# Altium PCB NBP-28 Pin_Swap_Example.PcbDoc (part 1 of 4)
Units mil, origin at the board's own origin, x right, y up, seen from the top; angles counter-clockwise.
Board outline 2716.54 x 4967.15 mil, 10 copper layers (Top Layer, Mid-Layer 1, VCC1V2, Mid-Layer 2, VCC, GND, MidLayer4, VCCINT, Mid-Layer 3, Bottom Layer), stack 81 mil thick; 254 components, 445 nets, 1667 pads, 770 vias.
Unrouted connection lines stored in the file: 611.
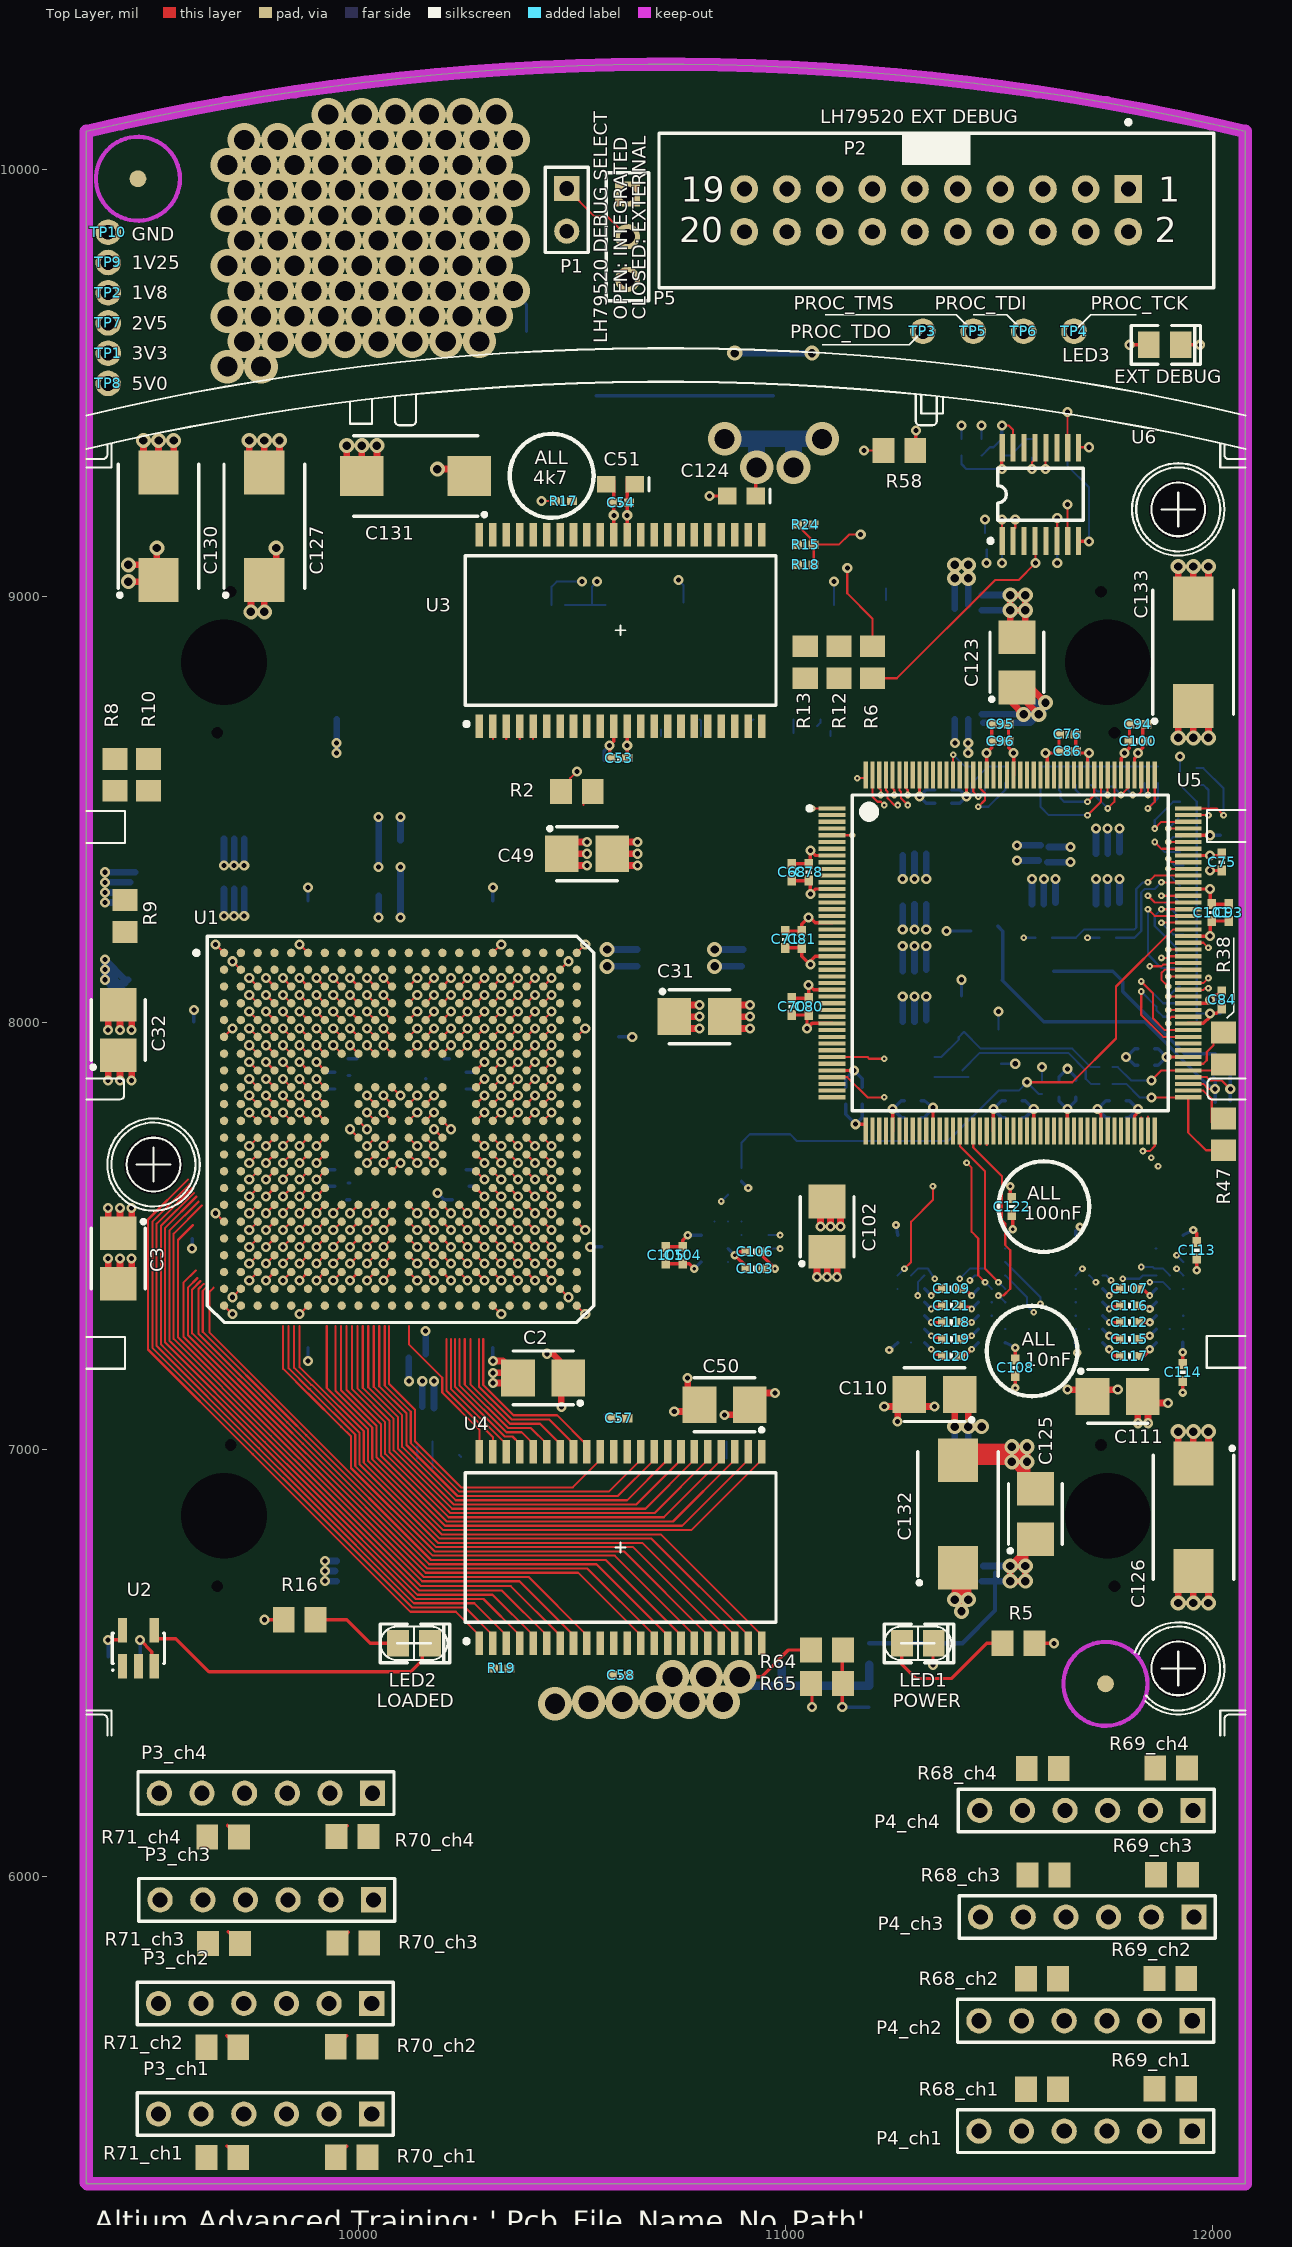
[diagram p0: Top Layer view]
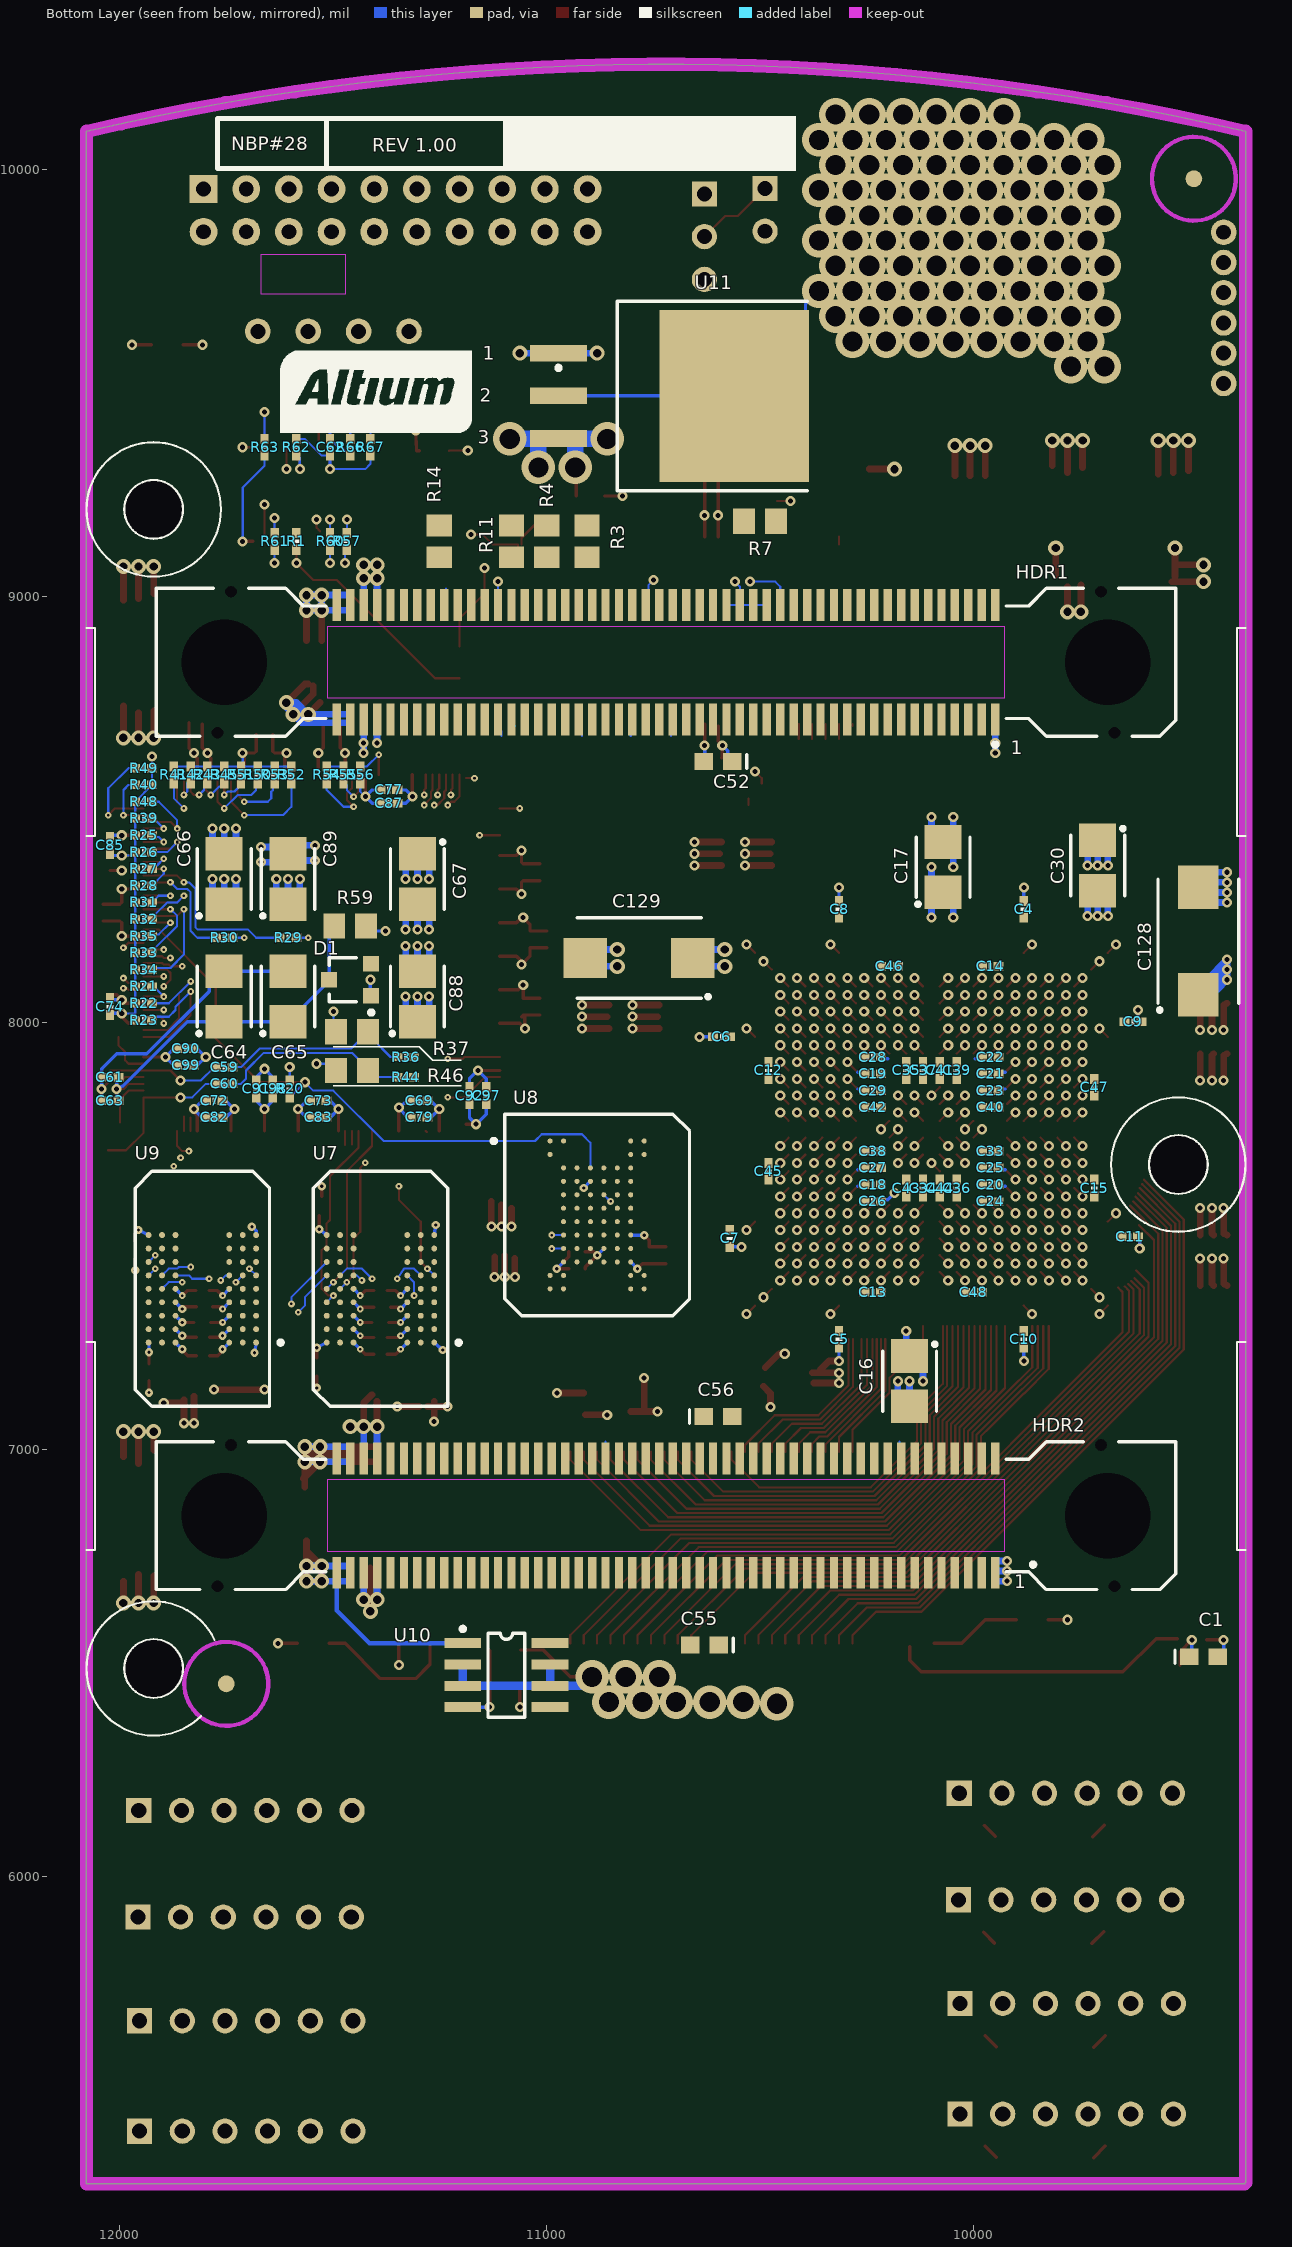
[diagram p1: Bottom Layer view, seen from below]
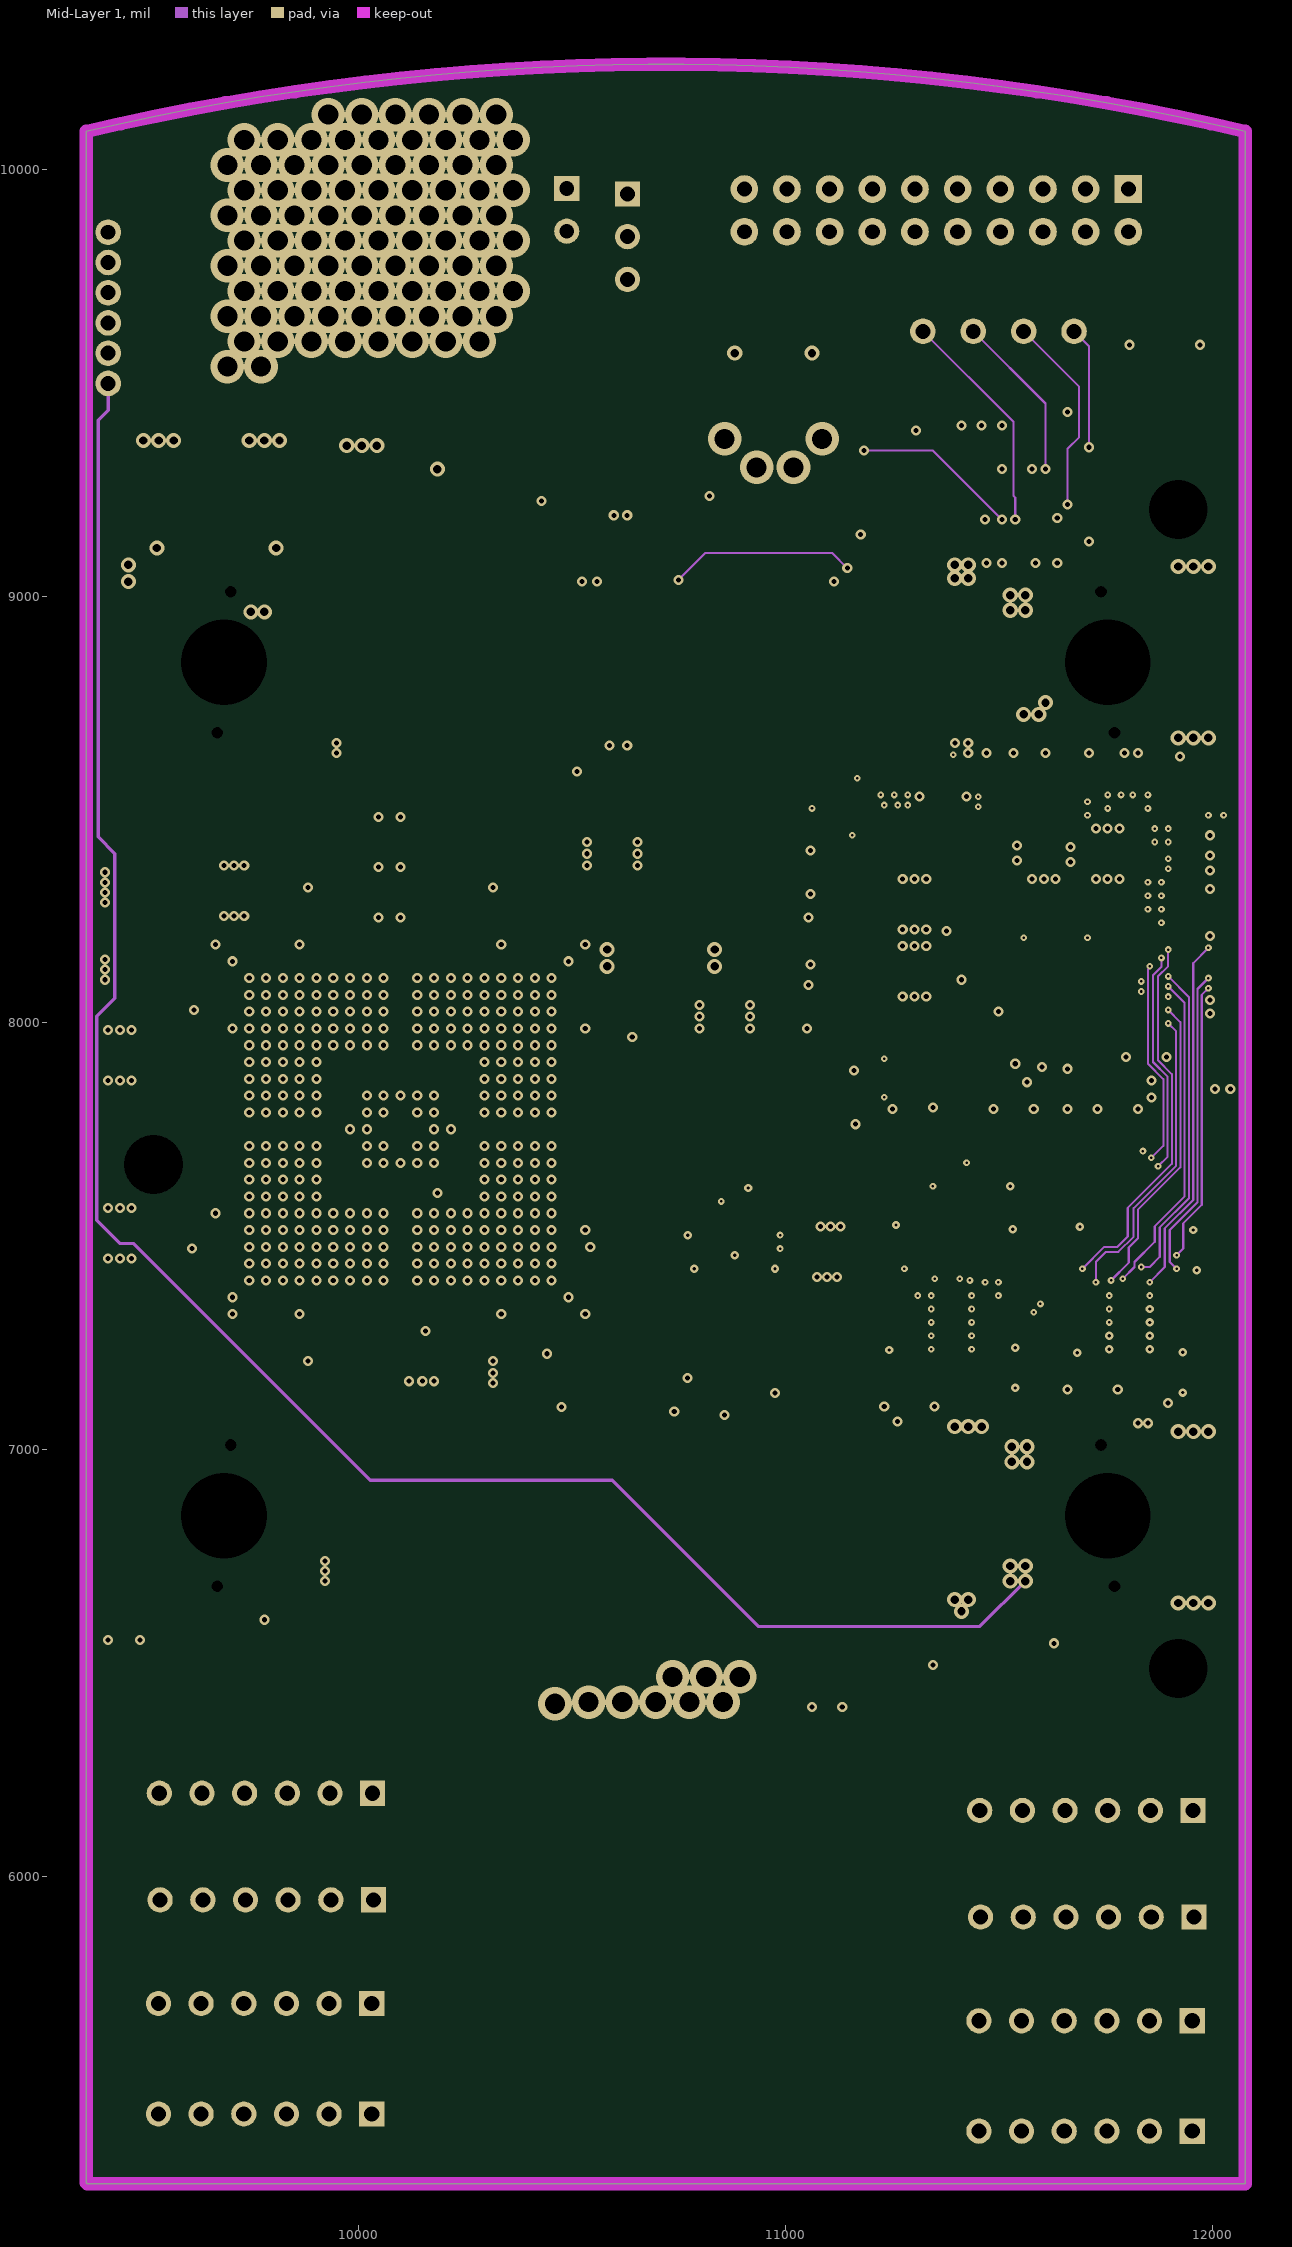
[diagram p2: Mid-Layer 1]
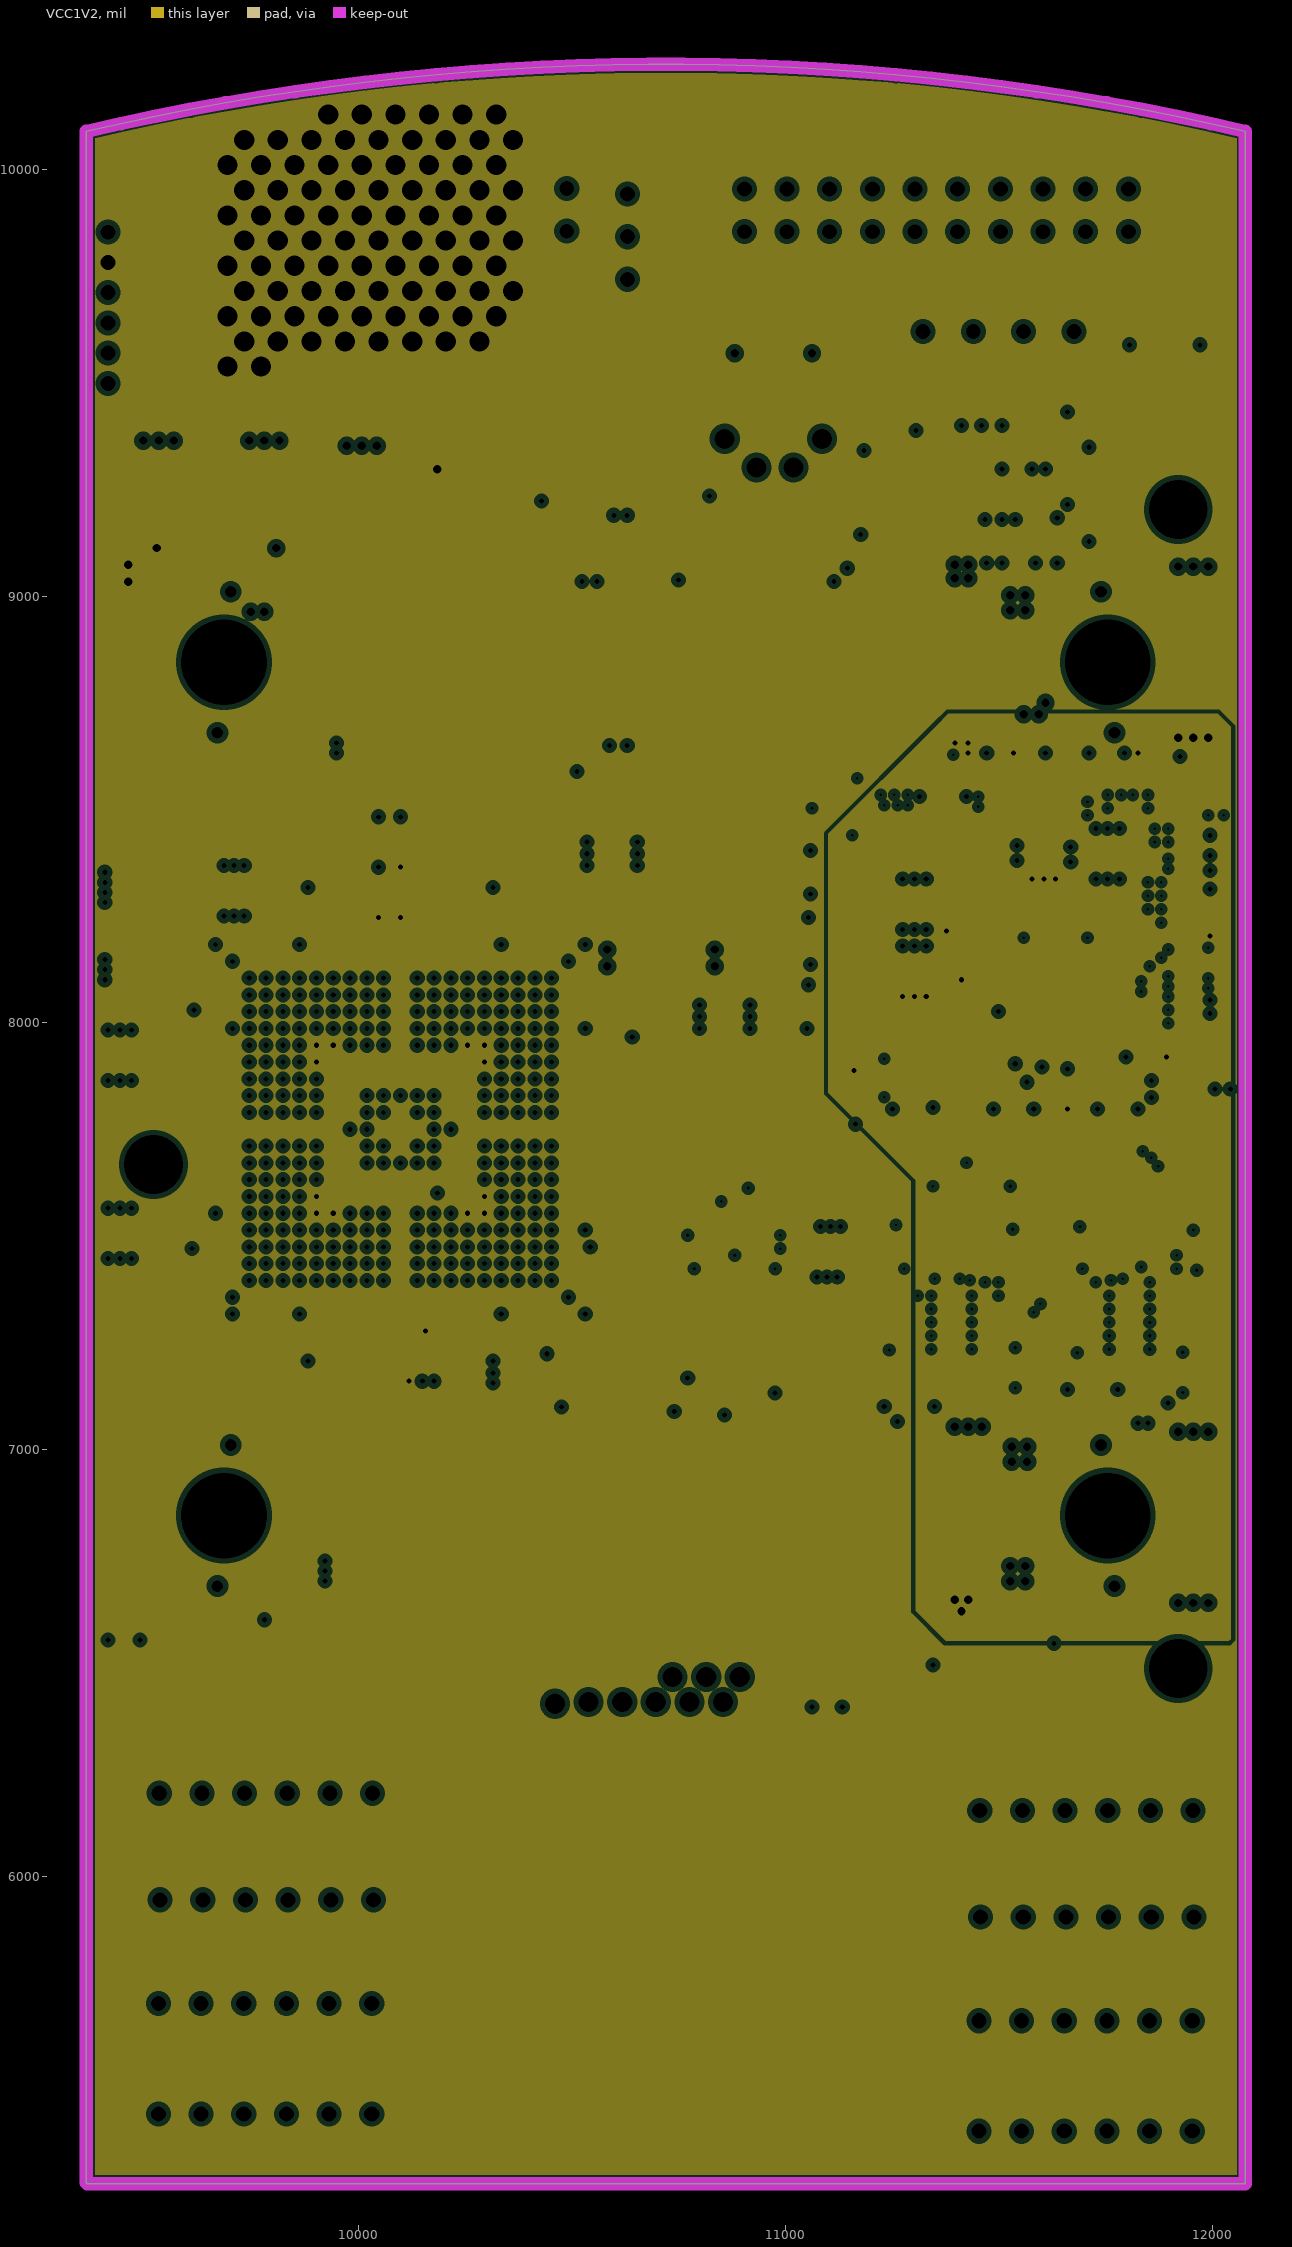
[diagram p3: VCC1V2, clearances drawn from the general rule]
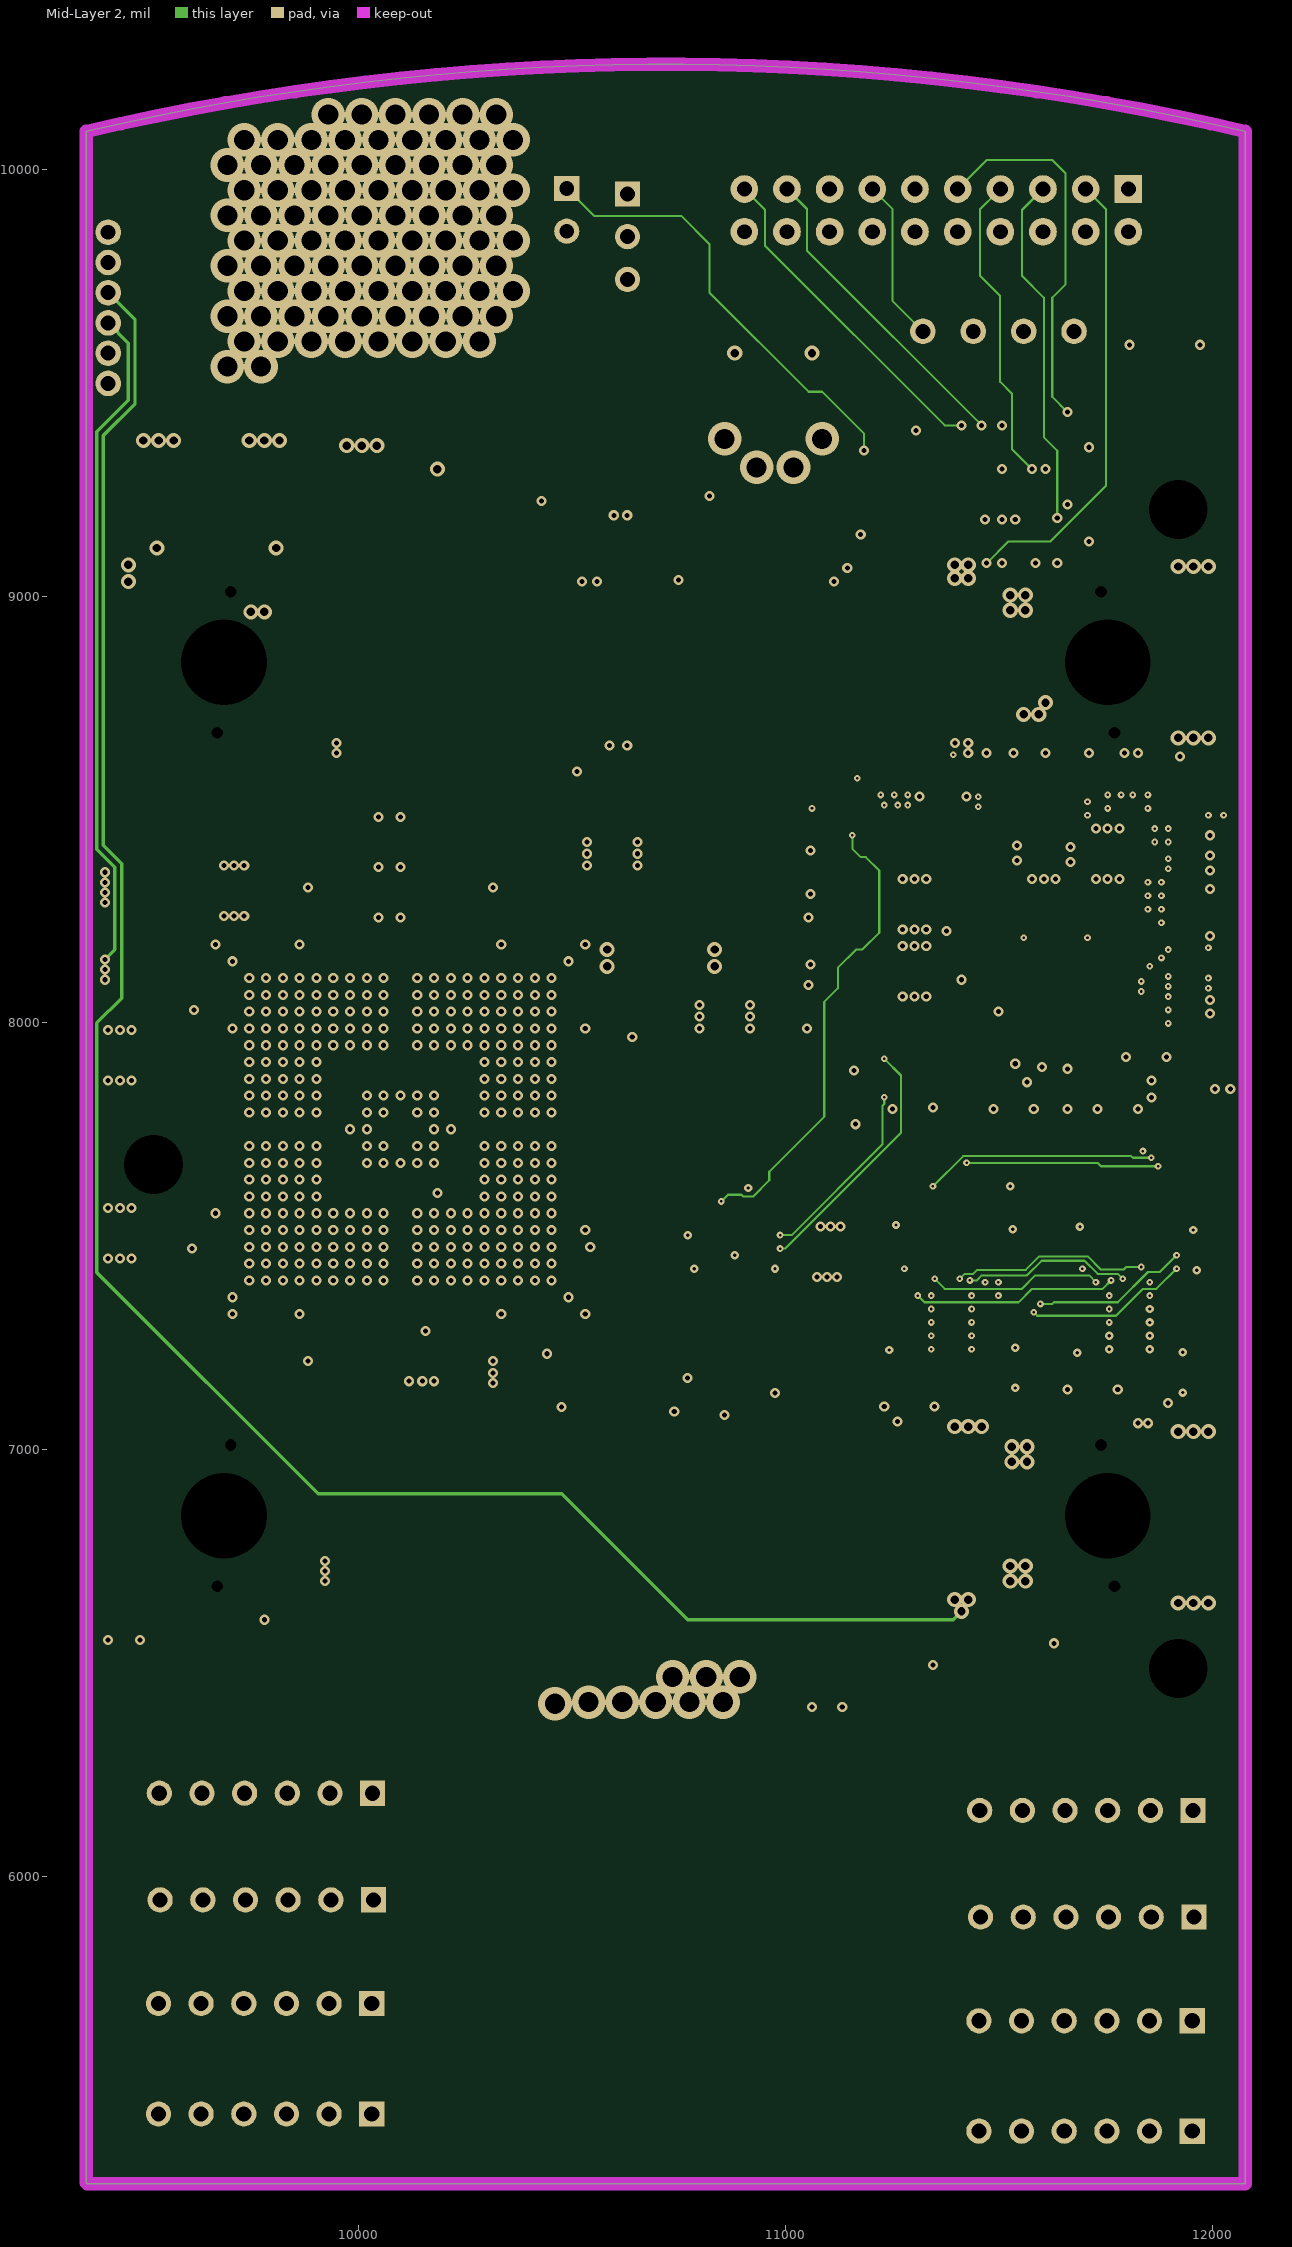
[diagram p4: Mid-Layer 2]
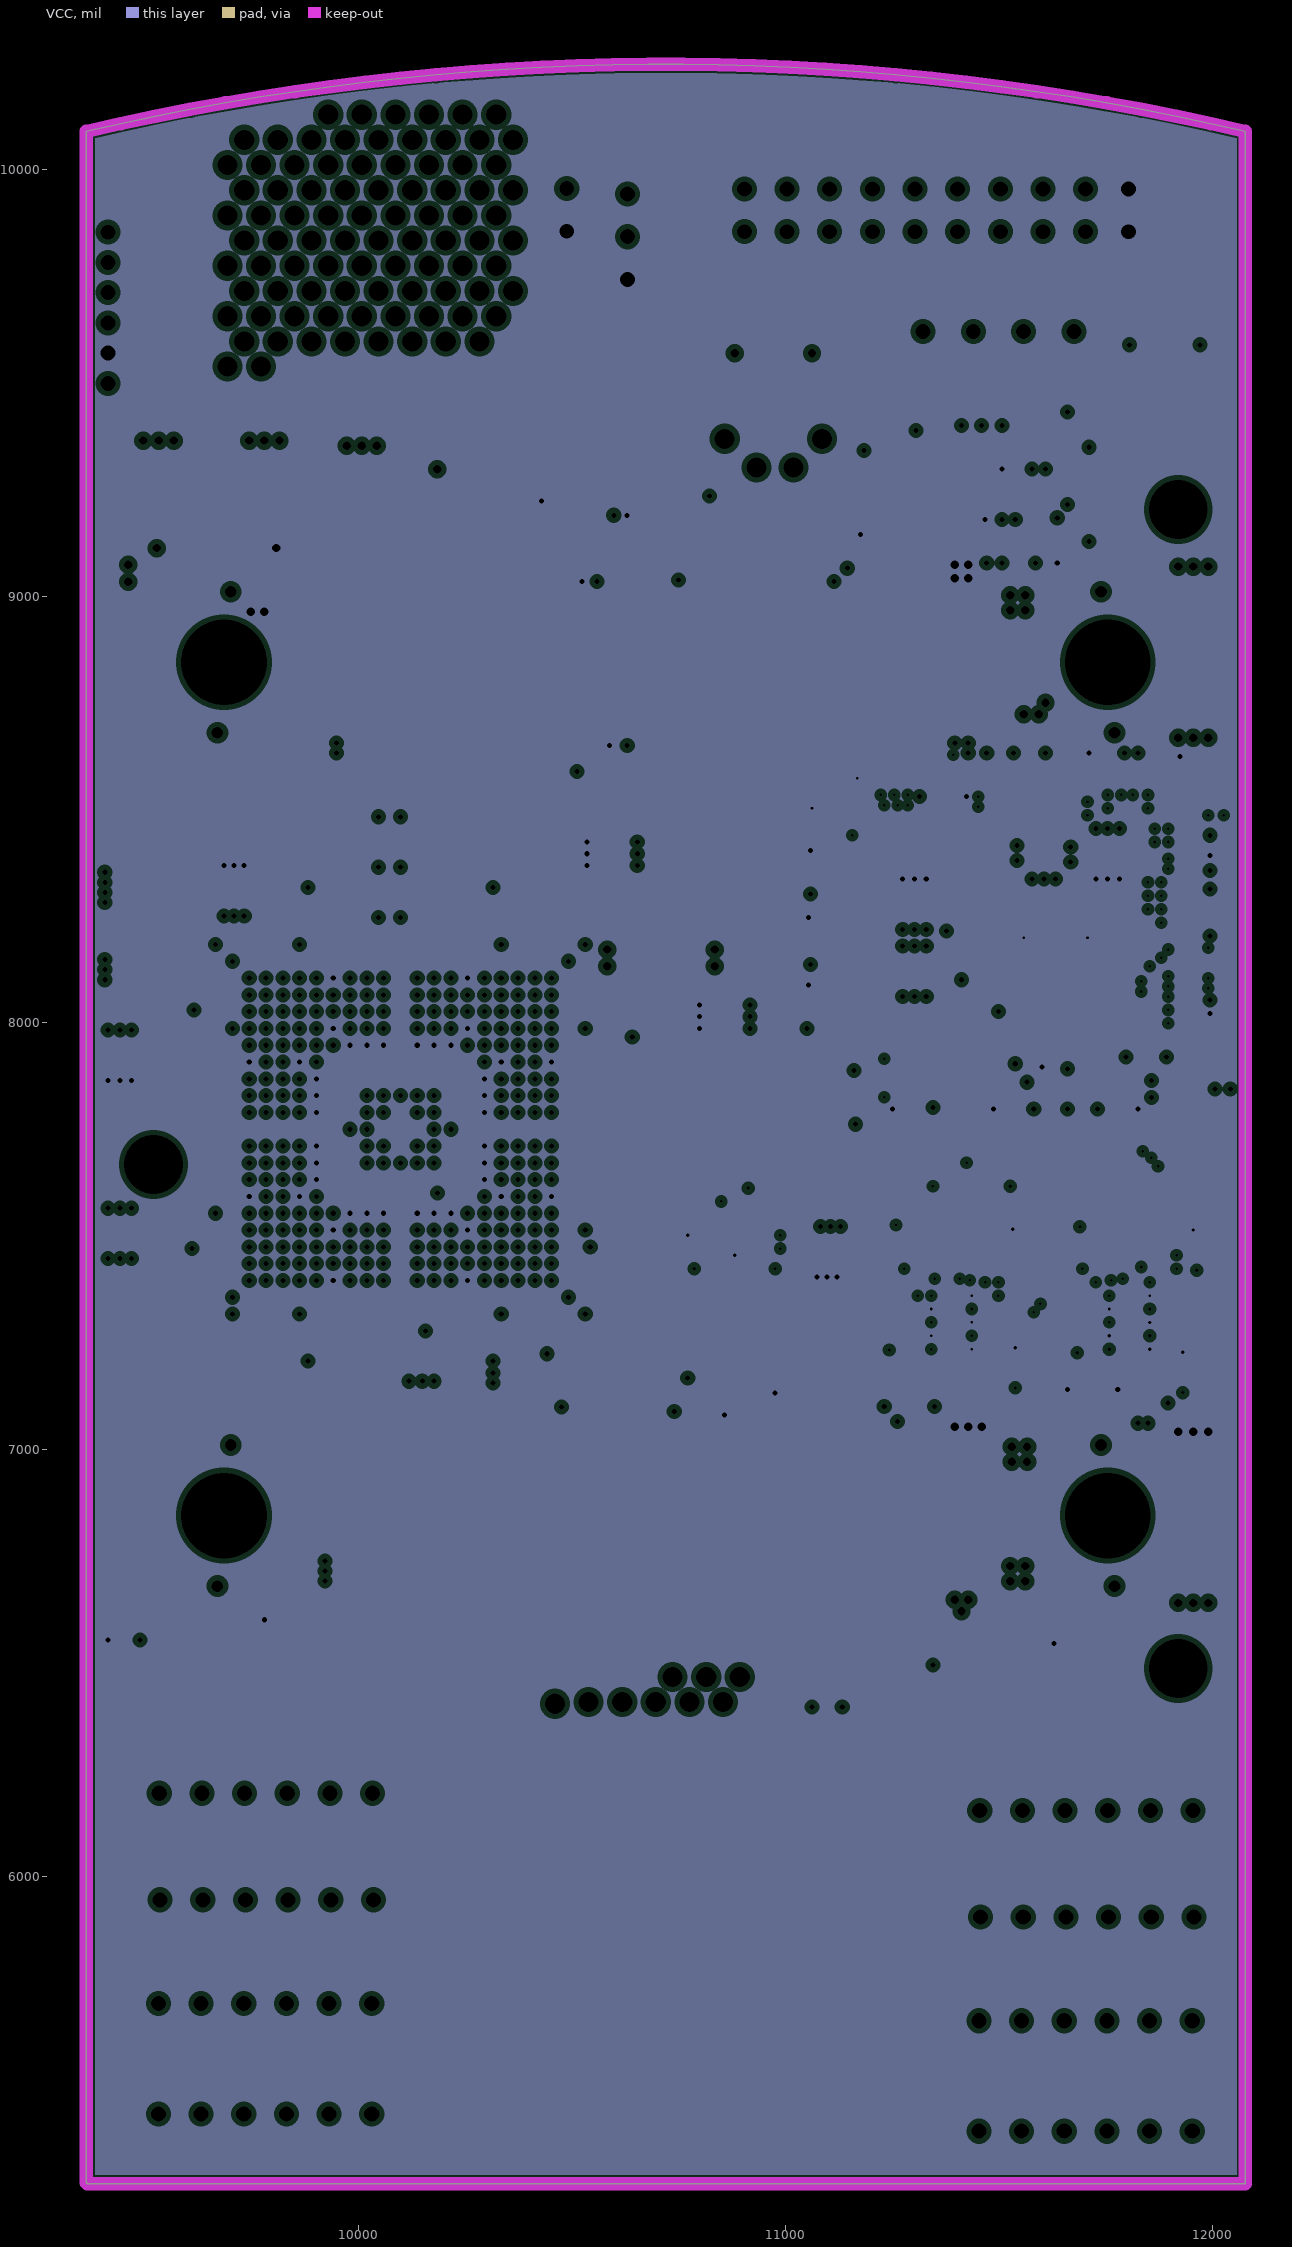
[diagram p5: VCC, clearances drawn from the general rule]
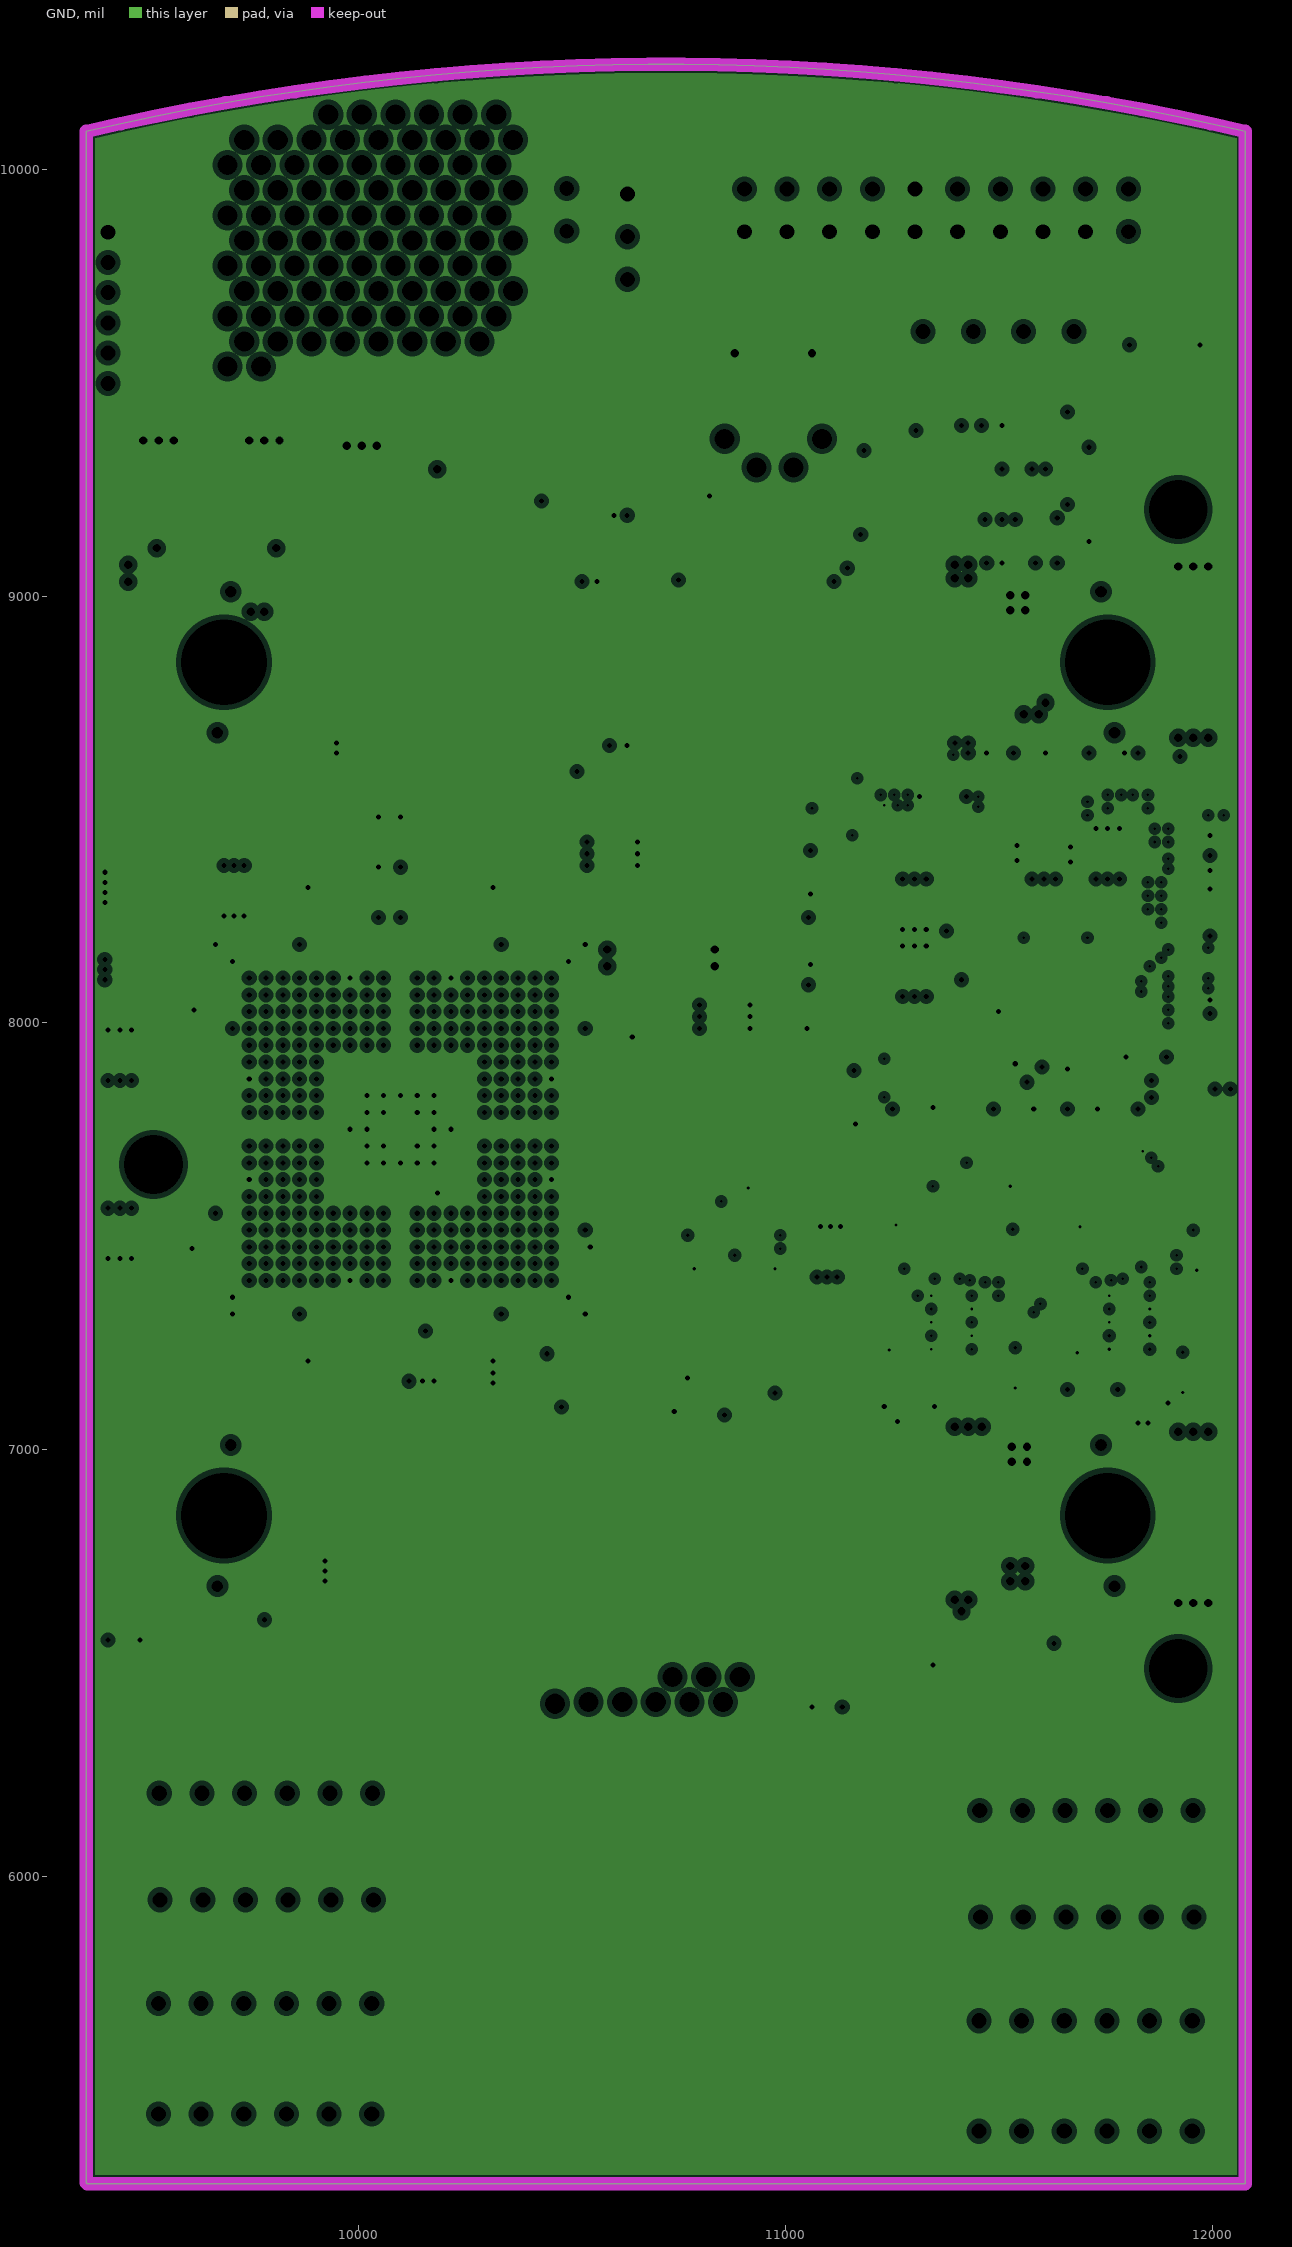
[diagram p6: GND, clearances drawn from the general rule]
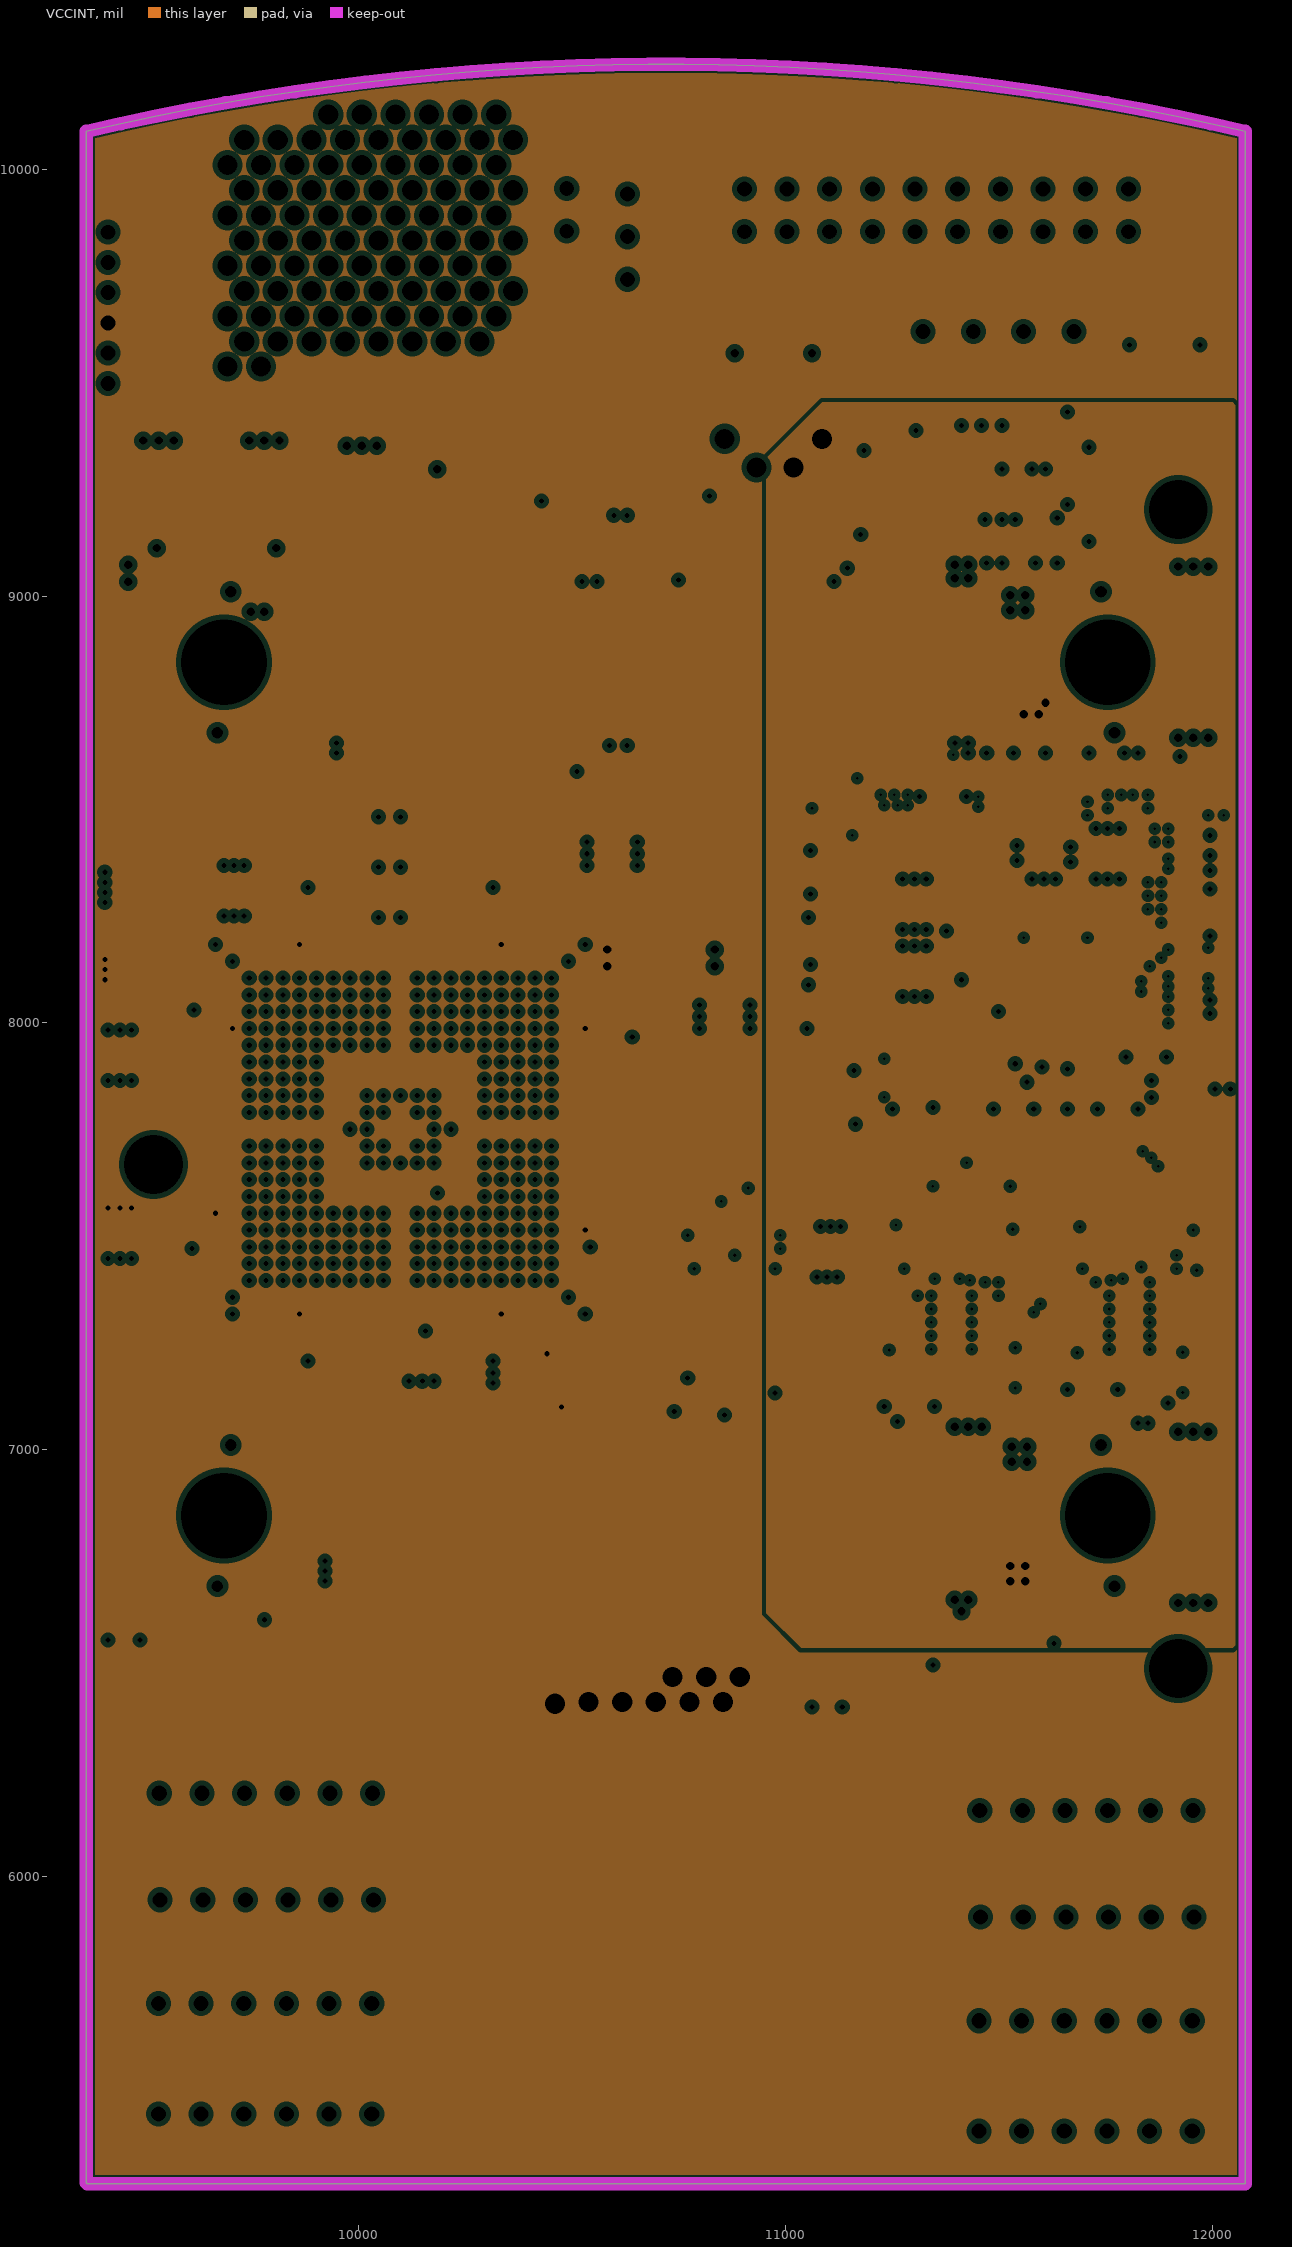
[diagram p7: VCCINT, clearances drawn from the general rule]
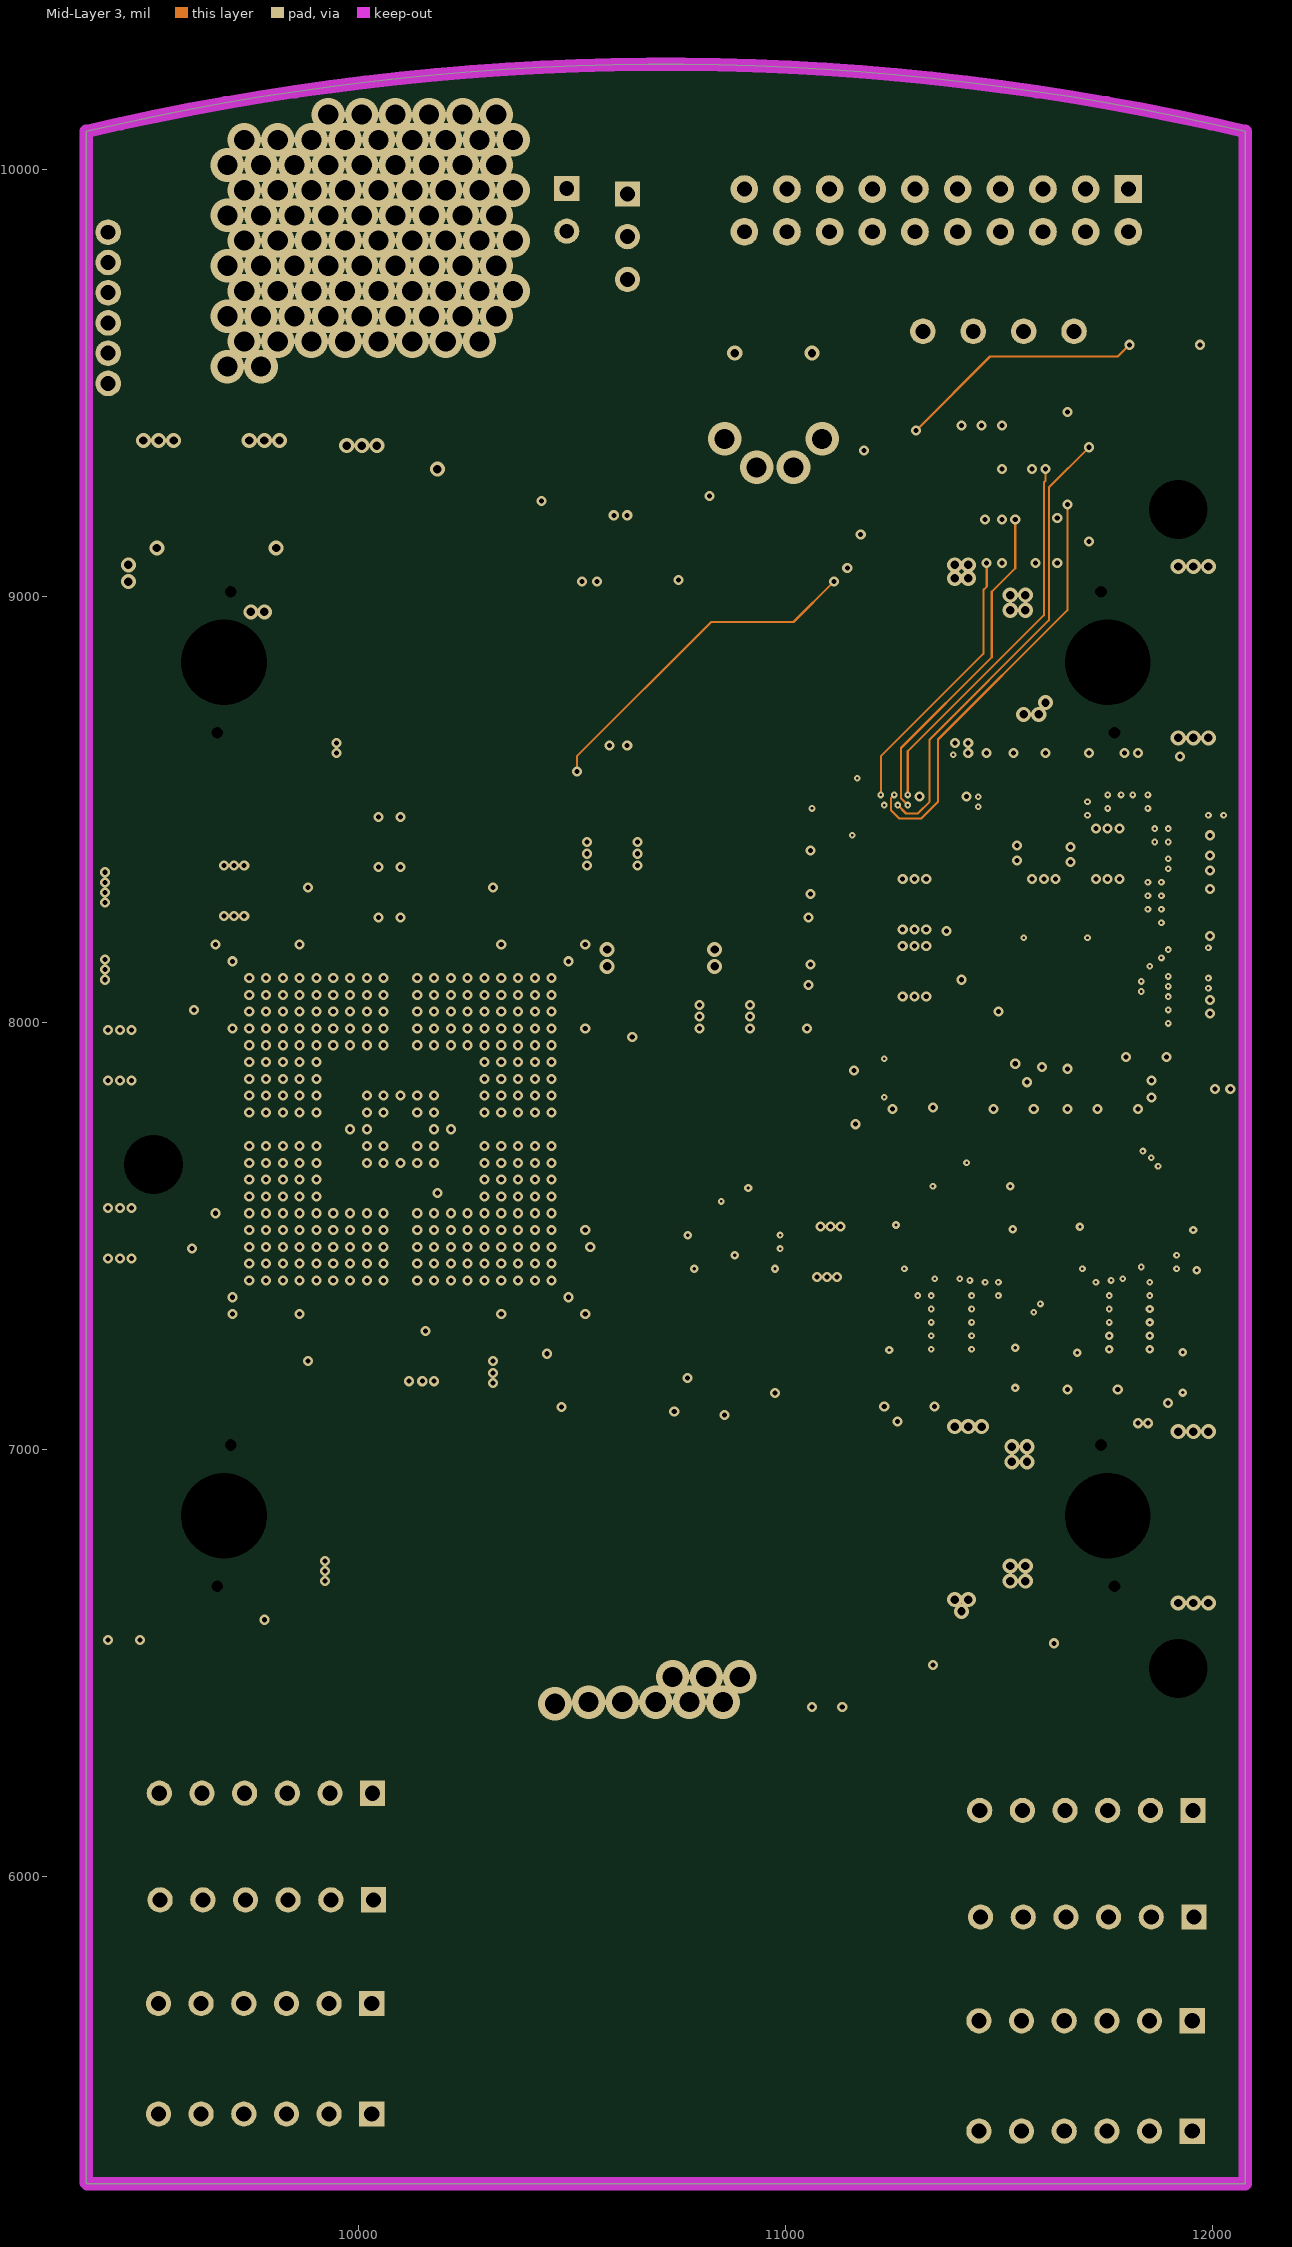
[diagram p8: Mid-Layer 3]

## Layer stack, top to bottom
Top Solder: solder mask 0.4, Solder Resist, Dk 3.5
Top Layer: signal copper 1.4
Dielectric1: core 7, FR-4, Dk 4.8
Mid-Layer 1: signal copper 1.4
Dielectric2: prepreg 8, FR-4, Dk 4.8
VCC1V2: plane copper 1.4, net (Multiple Nets)
Dielectric9: core 7, FR-4, Dk 4.8
Mid-Layer 2: signal copper 1.4
Dielectric3: prepreg 8, FR-4, Dk 4.8
VCC: plane copper 1.4, net VCC3V3
Dielectric8: core 7, FR-4, Dk 4.8
GND: plane copper 1.4, net GND
Dielectric6: prepreg 8, FR-4, Dk 4.8
MidLayer4: signal copper 1.4
Dielectric5: core 7, FR-4, Dk 4.8
VCCINT: plane copper 1.4, net (Multiple Nets)
Dielectric7: prepreg 8, FR-4, Dk 4.8
Mid-Layer 3: signal copper 1.4
Dielectric4: core 7, FR-4, Dk 4.8
Bottom Layer: signal copper 1.4
Bottom Solder: solder mask 0.4, Solder Resist, Dk 3.5

## Board outline
9361.68,5281.7 9361.68,10089.55 cw(c10719.92,4309.99) 12078.19,10089.54 12078.22,10089.55 12078.22,5279.7 9363.68,5279.7

## Design rules (kind name [scope] priority, off if disabled: settings)
Clearance "LQFP Clearance" [isPad and InComponent(U5) vs isPad and InComponent(U5)] p1: gap=5.91 ignorepadtopadclearanceinfootprint=FALSE except(0: Arc-Hole Track-Hole SMDPad-Hole THPad-Hole Via-Hole Fill-Hole Poly-Hole Region-Hole Text-Hole)
Clearance Clearance_Polygons [InPolygon] p2: gap=11.81 ignorepadtopadclearanceinfootprint=FALSE except(0: Arc-Hole Track-Hole SMDPad-Hole THPad-Hole Via-Hole Fill-Hole Poly-Hole Region-Hole Text-Hole)
Clearance "InnerLayer Track-Via Clearance" [OnMid And IsTrack vs IsVia] p3: gap=5 ignorepadtopadclearanceinfootprint=FALSE except(0: Arc-Hole Track-Hole SMDPad-Hole THPad-Hole Via-Hole Fill-Hole Poly-Hole Region-Hole Text-Hole)
Clearance "Via-Via Clearance" [IsVia vs IsVia] p4: gap=7.87 ignorepadtopadclearanceinfootprint=FALSE except(0: Arc-Hole Track-Hole SMDPad-Hole THPad-Hole Via-Hole Fill-Hole Poly-Hole Region-Hole Text-Hole)
Clearance "Pad-Pad Clearance Same Net" [IsPad vs IsPad] p5: gap=10 ignorepadtopadclearanceinfootprint=FALSE except(0: Arc-Hole Track-Hole SMDPad-Hole THPad-Hole Via-Hole Fill-Hole Poly-Hole Region-Hole Text-Hole)
Clearance "Via-Pad Clearance" [IsVia vs IsPad] p6: gap=5 ignorepadtopadclearanceinfootprint=FALSE except(0: Arc-Hole Track-Hole SMDPad-Hole THPad-Hole Via-Hole Fill-Hole Poly-Hole Region-Hole Text-Hole)
Clearance "General Clearance" [All] p7: gap=5 ignorepadtopadclearanceinfootprint=FALSE except(0: Arc-Hole Track-Hole SMDPad-Hole THPad-Hole Via-Hole Fill-Hole Poly-Hole Region-Hole Text-Hole)
ComponentClearance [All] p1 off: gap=7.87 collisioncheckmode=3 verticalgap=10 showdistances=FALSE
DiffPairsRouting [All] p1: maxlimit=10 minlimit=10 mostfreqgap=10 toplayer_minwidth=15 toplayer_maxwidth=15 toplayer_prefwidth=15 midlayer1_minwidth=15 midlayer1_maxwidth=15 midlayer1_prefwidth=15 midlayer2_minwidth=15 midlayer2_maxwidth=15 midlayer2_prefwidth=15 midlayer3_minwidth=15 midlayer3_maxwidth=15 midlayer3_prefwidth=15 midlayer4_minwidth=15 midlayer4_maxwidth=15 midlayer4_prefwidth=15 bottomlayer_minwidth=15 bottomlayer_maxwidth=15 bottomlayer_prefwidth=15 maxuncoupledlength=500
FabricationTestPointUsage TestPointUsage [All] p1 off: valid=0 allowmultiple=FALSE
FabricationTestpoint Testpoint [All] p1 off: side=3 testpointundercomponent=TRUE minsize=40 maxsize=100 preferedsize=60 minholesize=0 maxholesize=40 preferedholesize=32 testpointgrid=1 allowsidetop=TRUE allowsidebottom=TRUE usegrid=TRUE gridtolerance=0.01
HoleSize [All] p1: absolutevalues=TRUE maxlimit=204.72 minlimit=5.91 maxpercent=80.000 minpercent=20.000
MinimumSolderMaskSliver [All] p1: minsoldermaskwidth=5
PlaneClearance [All] p1: clearance=11.81
PlaneConnect [All] p1: planeconnectstyle=Direct reliefexpansion=19.68 reliefentries=4 reliefconductorwidth=9.84 reliefairgap=9.84
PolygonConnect "PolygonConnect - High Current" [InNet('+5V') or InNet(VCC2V5)] p1: connectstyle=Direct reliefconductorwidth=10 reliefentries=4 polygonreliefangle="90 Angle" airgapwidth=10
PolygonConnect "PolygonConnect - Heatsink" [(HasFootprint('TO-263') AND InNet('VCC1V2'))] p2: connectstyle=Direct reliefconductorwidth=10 reliefentries=4 polygonreliefangle="90 Angle" airgapwidth=10
PolygonConnect [All] p3: connectstyle=Relief reliefconductorwidth=11.81 reliefentries=4 polygonreliefangle="90 Angle" airgapwidth=10
RoomDefinition ch1 [InComponentClass('ch1')] p1: confinementstyle=ConfineIn formatcopy=TRUE lockcomponents=FALSE outline 9402.11,5304.34 12053.01,5304.34 12053.01,5538.53 9402.11,5538.53
RoomDefinition ch2 [InComponentClass('ch2')] p2: confinementstyle=ConfineIn formatcopy=TRUE lockcomponents=FALSE outline 9402.11,5554.93 12053.01,5554.93 12053.01,5800.27 9402.11,5800.27
RoomDefinition ch3 [InComponentClass('ch3')] p3: confinementstyle=ConfineIn formatcopy=TRUE lockcomponents=FALSE outline 9406.05,5805.52 12056.94,5805.52 12056.94,6039.71 9406.05,6039.71
RoomDefinition ch4 [InComponentClass('ch4')] p4: confinementstyle=ConfineIn formatcopy=TRUE lockcomponents=FALSE outline 9404.08,6056.11 12054.98,6056.11 12054.98,6290.3 9404.08,6290.3
RoutingVias [All] p1: holewidth=11.81 width=23.62 viastyle="Through Hole" minholewidth=5.91 minwidth=15.75 maxholewidth=28 maxwidth=50
SilkToSolderMaskClearance SilkscreenOverComponentPads [IsPad] p1: minsilkscreentomaskgap=5 clearancetoexposedcopper=TRUE
SolderMaskExpansion SolderMaskExpansion_0402 [HasFootprint('CC1005-0402')] p1: expansion=2.95 istentingtop=FALSE
SolderMaskExpansion SolderMaskExpansion_Vias [IsVia] p2: expansion=-25.59 istentingtop=FALSE
SolderMaskExpansion [All] p3: expansion=3.94 istentingtop=FALSE
SupplyNets SupplyNets_GND [InNet('GND')] p1: voltage=0,000
SupplyNets SupplyNets_3V3 [InNet('VCC3V3')] p2: voltage=3,000
SupplyNets SupplyNets_2V5 [InNet('VCC2V5')] p3: voltage=2,000
SupplyNets SupplyNets_1V8 [InNet('VCC1V8')] p4: voltage=1,000
SupplyNets SupplyNets_1V2 [InNet('VCC1V2')] p5: voltage=1,000
SupplyNets SupplyNets_5V [InNet('+5V')] p6: voltage=5,000
Width [All] p1: maxlimit=98.42 minlimit=5 preferedwidth=5
21 further rules are at their usual default settings.

## Classes and differential pairs
channel class Multi-channel_diff-pairs: ch1 ch2 ch3 ch4
component class ch1: P3_ch1 P4_ch1 R68_ch1 R69_ch1 R70_ch1 R71_ch1
component class ch2: P3_ch2 P4_ch2 R68_ch2 R69_ch2 R70_ch2 R71_ch2
component class ch3: P3_ch3 P4_ch3 R68_ch3 R69_ch3 R70_ch3 R71_ch3
component class ch4: P3_ch4 P4_ch4 R68_ch4 R69_ch4 R70_ch4 R71_ch4
component class TOP_SHEET: C123 C124 C125 C126 C127 C128 C129 C130 C131 C132 C133 R64 R65 TP7 TP8 TP9 TP10 U10 U11
component class U_FPGA_RAM: C49 C50 C51 C52 C53 C54 C55 C56 C57 C58 U3 U4
component class U_FPGA: C1 C2 C3 C4 C5 C6 C7 C8 C9 C10 C11 C12 C13 C14 C15 C16 C17 C18 C19 C20 C21 C22 C23 C24 C25 C26 C27 C28 C29 C30 C31 C32 C33 C34 C35 C36 C37 C38 C39 C40 C41 C42 C43 C44 C45 C46 C47 C48 HDR1 HDR2 LED1 LED2 R1 R2 R3 R4 R5 R6 R7 R8 R9 R10 R11 R12 R13 R14 R15 R16 R17 R18 R19 TP1 TP2 U1 U2
component class U_PROCESSOR_MEMORIES: C102 C103 C104 C105 C106 C107 C108 C109 C110 C111 C112 C113 C114 C115 C116 C117 C118 C119 C120 C121 C122 U7 U8 U9
component class U_PROCESSOR: C59 C60 C61 C62 C63 C64 C65 C66 C67 C68 C69 C70 C71 C72 C73 C74 C75 C76 C77 C78 C79 C80 C81 C82 C83 C84 C85 C86 C87 C88 C89 C90 C91 C92 C93 C94 C95 C96 C97 C98 C99 C100 C101 D1 LED3 P1 P2 P5 R20 R21 R22 R23 R24 R25 R26 R27 R28 R29 R30 R31 R32 R33 R34 R35 R36 R37 R38 R39 R40 R41 R42 R43 R44 R45 R46 R47 R48 R49 R50 R51 R52 R53 R54 R55 R56 R57 R58 R59 R60 R61 R62 R63 R66 R67 TP3 TP4 TP5 TP6 U5 U6
net class A[25..0]: A0 A1 A2 A3 A4 A5 A6 A7 A8 A9 A10 A11 A12 A13 A14 A15 A16 A17 A18 A19 A20 A21 A22 A23 A24 A25
net class D[31..0]: D0 D1 D2 D3 D4 D5 D6 D7 D8 D9 D10 D11 D12 D13 D14 D15 D16 D17 D18 D19 D20 D21 D22 D23 D24 D25 D26 D27 D28 D29 D30 D31
net class INT[4..0]: INT0 INT1 INT2 INT3 INT4
net class NBLE[3..0]: NBLE0 NBLE1 NBLE2 NBLE3
net class NCS[5..0]: NCS0 NCS1 NCS2 NCS3 NCS4 NCS5
net class SDRAM_DQM[3..0]: SDRAM_DQM0 SDRAM_DQM1 SDRAM_DQM2 SDRAM_DQM3
net class SRAM0_A[18..0]: SRAM0_A0 SRAM0_A1 SRAM0_A2 SRAM0_A3 SRAM0_A4 SRAM0_A5 SRAM0_A6 SRAM0_A7 SRAM0_A8 SRAM0_A9 SRAM0_A10 SRAM0_A11 SRAM0_A12 SRAM0_A13 SRAM0_A14 SRAM0_A15 SRAM0_A16 SRAM0_A17 SRAM0_A18
net class SRAM0_D[15..0]: SRAM0_D0 SRAM0_D1 SRAM0_D2 SRAM0_D3 SRAM0_D4 SRAM0_D5 SRAM0_D6 SRAM0_D7 SRAM0_D8 SRAM0_D9 SRAM0_D10 SRAM0_D11 SRAM0_D12 SRAM0_D13 SRAM0_D14 SRAM0_D15
net class SRAM1_A[18..0]: SRAM1_A0 SRAM1_A1 SRAM1_A2 SRAM1_A3 SRAM1_A4 SRAM1_A5 SRAM1_A6 SRAM1_A7 SRAM1_A8 SRAM1_A9 SRAM1_A10 SRAM1_A11 SRAM1_A12 SRAM1_A13 SRAM1_A14 SRAM1_A15 SRAM1_A16 SRAM1_A17 SRAM1_A18
net class SRAM1_D[15..0]: SRAM1_D0 SRAM1_D1 SRAM1_D2 SRAM1_D3 SRAM1_D4 SRAM1_D5 SRAM1_D6 SRAM1_D7 SRAM1_D8 SRAM1_D9 SRAM1_D10 SRAM1_D11 SRAM1_D12 SRAM1_D13 SRAM1_D14 SRAM1_D15
differential pair DIFF_RX_ch1: +DIFF_RX_ch1_P -DIFF_RX_ch1_N
differential pair DIFF_RX_ch2: +DIFF_RX_ch2_P -DIFF_RX_ch2_N
differential pair DIFF_RX_ch3: +DIFF_RX_ch3_P -DIFF_RX_ch3_N
differential pair DIFF_RX_ch4: +DIFF_RX_ch4_P -DIFF_RX_ch4_N
differential pair DIFF_TX_ch1: +DIFF_TX_ch1_P -DIFF_TX_ch1_N
differential pair DIFF_TX_ch2: +DIFF_TX_ch2_P -DIFF_TX_ch2_N
differential pair DIFF_TX_ch3: +DIFF_TX_ch3_P -DIFF_TX_ch3_N
differential pair DIFF_TX_ch4: +DIFF_TX_ch4_P -DIFF_TX_ch4_N

## Components (designator, comment, footprint, x,y, rotation, side; value= is the part's Value field where it differs from the comment)
C1 "220nF 10V" CAPC1608 9460.11,6514.74 r180 bottom
C2 "10uF 16V" CAPC3528 10432.55,7168.29 r180 top
C3 "10uF 16V" CAPC3528 9436.48,7447.81 r270 top
C4 "0.1uF 16V" CAPC1005 9881.37,8266.71 r90 bottom
C5 "0.1uF 16V" CAPC1005 10314.44,7258.84 r270 bottom
C6 "10nF 16V" CAPC1005 10590.03,7967.5 r0 bottom
C7 "10nF 16V" CAPC1005 10570.34,7495.06 r270 bottom
C8 "10nF 16V" CAPC1005 10314.44,8266.71 r90 bottom
C9 "10nF 16V" CAPC1005 9625.46,8002.93 r180 bottom
C10 "10nF 16V" CAPC1005 9881.37,7258.84 r270 bottom
C11 "10nF 16V" CAPC1005 9633.33,7499 r180 bottom
C12 "0.1uF 16V" CAPC1005 10479.79,7888.76 r270 bottom
C13 "0.1uF 16V" CAPC1005 10235.7,7369.07 r180 bottom
C14 "0.1uF 16V" CAPC1005 9960.11,8132.85 r0 bottom
C15 "0.1uF 16V" CAPC1005 9716.01,7613.17 r90 bottom
C16 "10uF 16V" CAPC3528 10149.08,7160.41 r270 bottom
C17 "10uF 16V" CAPC3528 10070.34,8365.14 r90 bottom
C18 "0.1uF 16V" CAPC1005 10235.7,7621.04 r180 bottom
C19 "0.1uF 16V" CAPC1005 10235.7,7880.89 r180 bottom
C20 "0.1uF 16V" CAPC1005 9960.11,7621.04 r0 bottom
C21 "0.1uF 16V" CAPC1005 9960.11,7880.89 r0 bottom
C22 "10nF 16V" CAPC1005 9960.11,7920.26 r0 bottom
C23 "10nF 16V" CAPC1005 9960.11,7841.52 r0 bottom
C24 "10nF 16V" CAPC1005 9960.11,7581.67 r0 bottom
C25 "10nF 16V" CAPC1005 9960.11,7660.41 r0 bottom
C26 "10nF 16V" CAPC1005 10235.7,7581.67 r180 bottom
C27 "10nF 16V" CAPC1005 10235.7,7660.41 r180 bottom
C28 "10nF 16V" CAPC1005 10235.7,7920.26 r180 bottom
C29 "10nF 16V" CAPC1005 10235.7,7841.52 r180 bottom
C30 "10uF 16V" CAPC3528 9708.14,8369.07 r270 bottom
C31 "10uF 16V" CAPC3528 10798.69,8014.74 r0 top
C32 "10uF 16V" CAPC3528 9436.48,7983.25 r90 top
C33 "0.1uF 16V" CAPC1005 9960.11,7699.78 r0 bottom
C34 "0.1uF 16V" CAPC1005 10117.59,7613.17 r90 bottom
C35 "0.1uF 16V" CAPC1005 10156.96,7888.76 r270 bottom
C36 "0.1uF 16V" CAPC1005 10038.85,7613.17 r90 bottom
C37 "10nF 16V" CAPC1005 10117.59,7888.76 r270 bottom
C38 "10nF 16V" CAPC1005 10235.7,7699.78 r180 bottom
C39 "10nF 16V" CAPC1005 10038.85,7888.76 r270 bottom
C40 "10nF 16V" CAPC1005 9960.11,7802.15 r0 bottom
C41 "0.1uF 16V" CAPC1005 10078.22,7888.76 r270 bottom
C42 "0.1uF 16V" CAPC1005 10235.7,7802.15 r180 bottom
C43 "10nF 16V" CAPC1005 10156.96,7613.17 r90 bottom
C44 "10nF 16V" CAPC1005 10078.22,7613.17 r90 bottom
C45 "10nF 16V" CAPC1005 10479.79,7652.54 r90 bottom
C46 "10nF 16V" CAPC1005 10196.33,8132.85 r180 bottom
C47 "10nF 16V" CAPC1005 9716.01,7849.39 r270 bottom
C48 "10nF 16V" CAPC1005 9999.48,7369.07 r0 bottom
C49 "10uF 16V" CAPC3528 10534.91,8396.63 r0 top
C50 "10uF 16V" CAPC3528 10857.74,7105.3 r180 top
C51 "220nF 10V" CAPC1608 10613.65,9262.78 r180 top
C52 "220nF 10V" CAPC1608 10597.9,8613.17 r0 bottom
C53 "10nF 16V" CAPC1005 10609.71,8621.04 r0 top
C54 "10nF 16V" CAPC1005 10613.65,9219.47 r180 top
C55 "220nF 10V" CAPC1608 10629.4,6542.3 r0 bottom
C56 "220nF 10V" CAPC1608 10597.9,7077.74 r180 bottom
C57 "10nF 16V" CAPC1005 10609.71,7073.8 r180 top
C58 "10nF 16V" CAPC1005 10613.65,6471.44 r0 top
C59 "0.1uF 16V" CAPC1005 11755.38,7896.63 r0 bottom
C60 "0.1uF 16V" CAPC1005 11755.38,7857.26 r0 bottom
C61 "10nF 16V" CAPC1005 12023.1,7873.01 r0 bottom
C62 "0.1uF 16V" CAPC1005 11507.35,9349.39 r90 bottom
C63 "0.1uF 16V" CAPC1005 12023.1,7817.89 r0 bottom
C64 "10uF 16V" CAPC3528 11755.38,8061.99 r90 bottom
C65 "10uF 16V" CAPC3528 11605.78,8061.99 r90 bottom
C66 "10uF 16V" CAPC3528 11755.38,8337.58 r90 bottom
C67 "10uF 16V" CAPC3528 11302.63,8337.58 r270 bottom
C68 "0.1uF 16V" CAPC1005 11015.22,8353.33 r270 top
C69 "0.1uF 16V" CAPC1005 11298.69,7817.89 r0 bottom
C70 "0.1uF 16V" CAPC1005 11015.22,8038.37 r270 top
C71 "0.1uF 16V" CAPC1005 10999.48,8195.85 r270 top
C72 "0.1uF 16V" CAPC1005 11779,7817.89 r180 bottom
C73 "0.1uF 16V" CAPC1005 11534.91,7817.89 r0 bottom
C74 "0.1uF 16V" CAPC1005 12023.1,8038.37 r90 bottom
C75 "0.1uF 16V" CAPC1005 12023.1,8376.95 r270 top
C76 "0.1uF 16V" CAPC1005 11660.89,8676.16 r180 top
C77 "0.1uF 16V" CAPC1005 11369.56,8546.24 r180 bottom
C78 "10nF 16V" CAPC1005 11054.59,8353.33 r270 top
C79 "10nF 16V" CAPC1005 11298.69,7778.52 r0 bottom
C80 "10nF 16V" CAPC1005 11054.59,8038.37 r270 top
C81 "10nF 16V" CAPC1005 11038.85,8195.85 r270 top
C82 "10nF 16V" CAPC1005 11779,7778.52 r180 bottom
C83 "10nF 16V" CAPC1005 11534.91,7778.52 r0 bottom
C84 "10nF 16V" CAPC1005 12023.1,8054.11 r90 top
C85 "10nF 16V" CAPC1005 12023.1,8416.32 r90 bottom
C86 "10nF 16V" CAPC1005 11660.89,8636.79 r180 top
C87 "10nF 16V" CAPC1005 11369.56,8514.74 r180 bottom
C88 "10uF 16V" CAPC3528 11302.63,8061.99 r90 bottom
C89 "10uF 16V" CAPC3528 11605.78,8337.58 r90 bottom
C90 "0.1uF 16V" CAPC1005 11845.93,7939.94 r180 bottom
C91 "0.1uF 16V" CAPC1005 11680.58,7845.45 r90 bottom
C92 "0.1uF 16V" CAPC1005 11180.58,7829.7 r270 bottom
C93 "0.1uF 16V" CAPC1005 12038.85,8258.84 r90 top
C94 "0.1uF 16V" CAPC1005 11826.25,8699.78 r180 top
C95 "0.1uF 16V" CAPC1005 11503.41,8699.78 r180 top
C96 "10nF 16V" CAPC1005 11503.41,8660.41 r180 top
C97 "10nF 16V" CAPC1005 11141.21,7829.7 r270 bottom
C98 "10nF 16V" CAPC1005 11641.21,7845.45 r90 bottom
C99 "10nF 16V" CAPC1005 11845.93,7900.57 r180 bottom
C100 "10nF 16V" CAPC1005 11826.25,8660.41 r180 top
C101 "10nF 16V" CAPC1005 11999.48,8258.84 r90 top
C102 "10uF 16V" CAPC3528 11097.9,7522.62 r90 top
C103 "0.1uF 16V" CAPC1005 10928.61,7424.19 r0 top
C104 "10nF 16V" CAPC1005 10759.32,7455.69 r270 top
C105 "10nF 16V" CAPC1005 10719.95,7455.69 r270 top
C106 "10nF 16V" CAPC1005 10928.61,7463.56 r0 top
C107 "10nF 16V" CAPC1005 11806.56,7376.95 r180 top
C108 "10nF 16V" CAPC1005 11538.85,7191.91 r270 top
C109 "10nF 16V" CAPC1005 11389.24,7376.95 r180 top
C110 "10uF 16V" CAPC3528 11349.87,7128.92 r180 top
C111 "10uF 16V" CAPC3528 11779,7124.98 r0 top
C112 "0.1uF 16V" CAPC1005 11806.56,7298.21 r180 top
C113 "0.1uF 16V" CAPC1005 11964.04,7467.5 r270 top
C114 "10nF 16V" CAPC1005 11931.56,7181.1 r270 top
C115 "10nF 16V" CAPC1005 11806.56,7258.84 r0 top
C116 "10nF 16V" CAPC1005 11806.56,7337.58 r0 top
C117 "10nF 16V" CAPC1005 11806.56,7219.47 r180 top
C118 "0.1uF 16V" CAPC1005 11389.24,7298.21 r180 top
C119 "10nF 16V" CAPC1005 11389.24,7258.84 r0 top
C120 "10nF 16V" CAPC1005 11389.24,7219.47 r180 top
C121 "10nF 16V" CAPC1005 11389.24,7337.58 r0 top
C122 "0.1uF 16V" CAPC1005 11530.97,7569.86 r90 top
C123 "10uF 16V" CAPC3528 11542.78,8845.45 r90 top
C124 "220nF 10V" CAPC1608 10897.11,9235.22 r180 top
C125 "10uF 16V" CAPC3528 11586.09,6849.39 r90 top
C126 "220uF 4V" CAPC7343 11956.17,6841.52 r270 top
C127 "220uF 4V" CAPC7343 9779,9164.35 r90 top
C128 "220uF 4V" CAPC7343 9471.92,8191.91 r90 bottom
C129 "220uF 4V" CAPC7343 10782.94,8152.54 r0 bottom
C130 "220uF 4V" CAPC7343 9530.97,9164.35 r90 top
C131 "220uF 4V" CAPC7343 10133.33,9282.46 r180 top
C132 "220uF 4V" CAPC7343 11404.99,6849.39 r90 top
C133 "220uF 4V" CAPC7343 11956.17,8869.07 r90 top
D1 "200mA 30V" SOT95P230-3 11460.11,8101.36 r90 bottom
HDR1 "DOCKSTAT M HEADER" 54075 10719.95,8845.45 r0 bottom locked
HDR2 "DOCKSTAT M HEADER" 54075 10719.95,6845.45 r0 bottom locked
LED1 "RED" LED2013 11310.5,6546.24 r180 top locked
LED2 "GREEN" LED2013 10129.4,6546.24 r180 top locked
LED3 "RED" LED2013 11889.24,9589.55 r180 top
P1 "1x2 HEADER" HDR1X2 10487.67,9955.69 r270 top
P2 "2x10 IDC HEADER" IDC2.54-V20D 11353.81,9904.51 r180 top locked
P3_ch1 "Header 6" HDR1X6 10030.76,5443.08 r180 top (schematic designator P3)
P3_ch2 "Header 6" HDR1X6 10030.76,5701.87 r180 top (schematic designator P3)
P3_ch3 "Header 6" HDR1X6 10034.7,5944.92 r180 top (schematic designator P3)
P3_ch4 "Header 6" HDR1X6 10032.73,6194.86 r180 top (schematic designator P3)
P4_ch1 "Header 6" HDR1X6 11953.62,5402.74 r180 top (schematic designator P4)
P4_ch2 "Header 6" HDR1X6 11953.62,5661.53 r180 top (schematic designator P4)
P4_ch3 "Header 6" HDR1X6 11957.56,5904.58 r180 top (schematic designator P4)
P4_ch4 "Header 6" HDR1X6 11955.59,6154.51 r180 top (schematic designator P4)
P5 "Header 3" HDR1X3 10630.02,9942.91 r270 top
R1 "4K7 5%" RESC1005 11586.09,9128.92 r270 bottom
R2 "100R 5%" RESC2012 10511.29,8542.3 r0 top
R3 "100R 5%" RESC2012 10904.99,9128.92 r90 bottom
R4 "100R 5%" RESC2012 10999.48,9128.92 r90 bottom
R5 "270R 1%" RESC2012 11546.72,6546.24 r180 top
R6 "100R 5%" RESC2012 11204.2,8845.45 r90 top
R7 "100R 5%" RESC2012 10499.48,9176.16 r180 bottom
R8 "100R 5%" RESC2012 9428.61,8581.67 r270 top
R9 "100R 5%" RESC2012 9452.23,8250.96 r270 top
R10 "100R 5%" RESC2012 9507.35,8581.67 r270 top
R11 "100R 5%" RESC2012 11082.15,9128.92 r90 bottom
R12 "100R 5%" RESC2012 11125.46,8845.45 r270 top
R13 "100R 5%" RESC2012 11046.72,8845.45 r270 top
R14 "100R 5%" RESC2012 11251.45,9128.92 r270 bottom
R15 "4K7 5%" RESC1005 11046.72,9121.04 r180 top
R16 "100R 5%" RESC2012 9861.68,6601.36 r180 top
R17 "4K7 5%" RESC1005 10479.79,9223.41 r0 top
R18 "4K7 5%" RESC1005 11046.72,9073.8 r180 top
R19 "4K7 5%" RESC1005 10334.12,6487.18 r0 top
R20 "4K7 5%" RESC1005 11601.84,7845.45 r270 bottom
R21 "4K7 5%" RESC1005 11944.36,8085.61 r180 bottom
R22 "4K7 5%" RESC1005 11944.36,8046.24 r180 bottom
R23 "4K7 5%" RESC1005 11944.36,8006.87 r180 bottom
R24 "4K7 5%" RESC1005 11046.72,9168.29 r0 top
R25 "4K7 5%" RESC1005 11944.36,8439.94 r180 bottom
R26 "4K7 5%" RESC1005 11944.36,8400.57 r180 bottom
R27 "4K7 5%" RESC1005 11944.36,8361.2 r180 bottom
R28 "4K7 5%" RESC1005 11944.36,8321.83 r180 bottom
R29 "4K7 5%" RESC1005 11605.78,8199.78 r0 bottom
R30 "4K7 5%" RESC1005 11755.38,8199.78 r0 bottom
R31 "4K7 5%" RESC1005 11944.36,8282.46 r180 bottom
R32 "4K7 5%" RESC1005 11944.36,8243.09 r180 bottom
R33 "4K7 5%" RESC1005 11944.36,8164.35 r180 bottom
R34 "4K7 5%" RESC1005 11944.36,8124.98 r180 bottom
R35 "4K7 5%" RESC1005 11944.36,8203.72 r180 bottom
R36 "4K7 5%" RESC1005 11330.19,7920.26 r0 bottom
R37 "270R 1%" RESC2012 11456.17,7979.31 r180 bottom
R38 "10M 5%" RESC2012 12027.04,7939.94 r90 top
R39 "4K7 5%" RESC1005 11944.36,8479.31 r180 bottom
R40 "4K7 5%" RESC1005 11944.36,8558.05 r0 bottom
R41 "4K7 5%" RESC1005 11873.49,8581.67 r270 bottom
R42 "4K7 5%" RESC1005 11834.12,8581.67 r270 bottom
R43 "4K7 5%" RESC1005 11794.75,8581.67 r270 bottom
R44 "4K7 5%" RESC1005 11330.19,7873.01 r0 bottom
R45 "4K7 5%" RESC1005 11755.38,8581.67 r270 bottom
R46 "270R 1%" RESC2012 11456.17,7888.76 r180 bottom
R47 "10M 5%" RESC2012 12027.04,7739.15 r90 top
R48 "4K7 5%" RESC1005 11944.36,8518.68 r180 bottom
R49 "4K7 5%" RESC1005 11944.36,8597.42 r0 bottom
R50 "4K7 5%" RESC1005 11676.64,8581.67 r270 bottom
R51 "4K7 5%" RESC1005 11716.01,8581.67 r270 bottom
R52 "4K7 5%" RESC1005 11597.9,8581.67 r270 bottom
R53 "4K7 5%" RESC1005 11637.27,8581.67 r270 bottom
R54 "4K7 5%" RESC1005 11515.22,8581.67 r270 bottom
R55 "4K7 5%" RESC1005 11475.85,8581.67 r270 bottom
R56 "4K7 5%" RESC1005 11436.48,8581.67 r90 bottom
R57 "4K7 5%" RESC1005 11467.98,9128.92 r270 bottom
R58 "270R 1%" RESC2012 11267.19,9341.52 r0 top
R59 "100R 5%" RESC2012 11460.11,8227.34 r0 bottom
R60 "4K7 5%" RESC1005 11507.35,9128.92 r90 bottom
R61 "4K7 5%" RESC1005 11637.27,9128.92 r270 bottom
R62 "4K7 5%" RESC1005 11586.09,9349.39 r90 bottom
R63 "4K7 5%" RESC1005 11660.89,9349.39 r270 bottom
R64 "270R 1%" RESC2012 11097.9,6530.49 r0 top
R65 "270R 1%" RESC2012 11097.9,6451.75 r180 top
R66 "4K7 5%" RESC1005 11460.11,9349.39 r270 bottom
R67 "4K7 5%" RESC1005 11412.86,9349.39 r270 bottom
R68_ch1 "50R 1%" RESC2012 11601.35,5501.14 r0 top (schematic designator R68)
R68_ch2 "50R 1%" RESC2012 11601.35,5759.93 r0 top (schematic designator R68)
R68_ch3 "50R 1%" RESC2012 11605.29,6002.98 r0 top (schematic designator R68)
R68_ch4 "50R 1%" RESC2012 11603.32,6252.91 r0 top (schematic designator R68)
R69_ch1 "50R 1%" RESC2012 11902.33,5502.12 r0 top (schematic designator R69)
R69_ch2 "50R 1%" RESC2012 11902.33,5760.91 r0 top (schematic designator R69)
R69_ch3 "50R 1%" RESC2012 11906.26,6003.96 r0 top (schematic designator R69)
R69_ch4 "50R 1%" RESC2012 11904.3,6253.9 r0 top (schematic designator R69)
R70_ch1 "50R 1%" RESC2012 9983.53,5341.73 r0 top (schematic designator R70)
R70_ch2 "50R 1%" RESC2012 9983.53,5600.52 r0 top (schematic designator R70)
R70_ch3 "50R 1%" RESC2012 9987.46,5843.57 r0 top (schematic designator R70)
R70_ch4 "50R 1%" RESC2012 9985.5,6093.5 r0 top (schematic designator R70)
R71_ch1 "50R 1%" RESC2012 9680.46,5340.74 r0 top (schematic designator R71)
R71_ch2 "50R 1%" RESC2012 9680.46,5599.54 r0 top (schematic designator R71)
R71_ch3 "50R 1%" RESC2012 9684.39,5842.58 r0 top (schematic designator R71)
R71_ch4 "50R 1%" RESC2012 9682.42,6092.52 r0 top (schematic designator R71)
TP1 "3V3" TestPin 9412.86,9569.86 r0 top
TP2 "1V8" TestPin 9412.86,9711.59 r90 top
TP3 "PROC_TDO" TestPin 11322.31,9621.04 r90 top
TP4 "PROC_TCK" TestPin 11676.64,9621.04 r90 top
TP5 "PROC_TMS" TestPin 11440.42,9621.04 r90 top
TP6 "PROC_TDI" TestPin 11558.53,9621.04 r90 top
TP7 "2V5" TestPin 9412.86,9640.73 r90 top
TP8 "5V0" TestPin 9412.86,9499 r90 top
TP9 "1V25" TestPin 9412.84,9782.45 r90 top
TP10 "GND" TestPin 9412.86,9853.33 r90 top
U1 "XC3S1000-4FG456C" BGA100P22X22-456 10097.9,7750.96 r0 top locked
U2 "SN74LVC1G04DBV" SOT95P280-5 9483.73,6534.43 r0 top
U3 "SRAM-256Kx16" TSOP80P1176-44 10613.65,8920.26 r0 top locked
U4 "SRAM-256Kx16" TSOP80P1176-44 10613.65,6770.65 r0 top locked
U5 "LH79520N0M000" QFP40P2000X2000-176 11527.04,8164.35 r0 top locked
U6 "74LCX157" TSOP65P638-16 11597.9,9239.15 r0 top locked
U7 "SDRAM-16Mx16" BGA80P9X6-54 11389.24,7376.95 r270 bottom locked
U8 "FLASH-4Mx16" BGA80P12X8-63 10881.37,7550.18 r90 bottom locked
U9 "SDRAM-16Mx16" BGA80P9X6-54 11806.56,7376.95 r270 bottom locked
U10 "VRG-100mA-1.2V-37V-4%-75102" SOP127P600-8 11093.96,6471.44 r270 bottom locked
U11 "LM1084IS-ADJ" TO254P1435-4 10971.92,9569.86 r270 bottom

## Footprints (in the part's own frame and the unit in brackets; to place one, negate y for a bottom-side part, rotate by r counter-clockwise, add the part's x,y. Pads: shape width x height; smd on the part's side, far side on the other; paste and mask are expansions set on the pad)
54075 [mm] "Connector; Docking Station, Receptacle; 100 Position; Vertical"
  rect 0.5x1.9 smd: 1(-19.6,3.4) 2(-19.6,-3.4) 3(-18.8,3.4) 4(-18.8,-3.4) 5(-18,3.4) 6(-18,-3.4) 7(-17.2,3.4) 8(-17.2,-3.4) 9(-16.4,3.4) 10(-16.4,-3.4) 11(-15.6,3.4) 12(-15.6,-3.4) 13(-14.8,3.4) 14(-14.8,-3.4) 15(-14,3.4) 16(-14,-3.4) 17(-13.2,3.4) 18(-13.2,-3.4) 19(-12.4,3.4) 20(-12.4,-3.4) 21(-11.6,3.4) 22(-11.6,-3.4) 23(-10.8,3.4) 24(-10.8,-3.4) 25(-10,3.4) 26(-10,-3.4) 27(-9.2,3.4) 28(-9.2,-3.4) 29(-8.4,3.4) 30(-8.4,-3.4) 31(-7.6,3.4) 32(-7.6,-3.4) 33(-6.8,3.4) 34(-6.8,-3.4) 35(-6,3.4) 36(-6,-3.4) 37(-5.2,3.4) 38(-5.2,-3.4) 39(-4.4,3.4) 40(-4.4,-3.4) 41(-3.6,3.4) 42(-3.6,-3.4) 43(-2.8,3.4) 44(-2.8,-3.4) 45(-2,3.4) 46(-2,-3.4) 47(-1.2,3.4) 48(-1.2,-3.4) 49(-0.4,3.4) 50(-0.4,-3.4) 51(0.4,3.4) 52(0.4,-3.4) 53(1.2,3.4) 54(1.2,-3.4) 55(2,3.4) 56(2,-3.4) 57(2.8,3.4) 58(2.8,-3.4) 59(3.6,3.4) 60(3.6,-3.4) 61(4.4,3.4) 62(4.4,-3.4) 63(5.2,3.4) 64(5.2,-3.4) 65(6,3.4) 66(6,-3.4) 67(6.8,3.4) 68(6.8,-3.4) 69(7.6,3.4) 70(7.6,-3.4) 71(8.4,3.4) 72(8.4,-3.4) 73(9.2,3.4) 74(9.2,-3.4) 75(10,3.4) 76(10,-3.4) 77(10.8,3.4) 78(10.8,-3.4) 79(11.6,3.4) 80(11.6,-3.4) 81(12.4,3.4) 82(12.4,-3.4) 83(13.2,3.4) 84(13.2,-3.4) 85(14,3.4) 86(14,-3.4) 87(14.8,3.4) 88(14.8,-3.4) 89(15.6,3.4) 90(15.6,-3.4) 91(16.4,3.4) 92(16.4,-3.4) 93(17.2,3.4) 94(17.2,-3.4) 95(18,3.4) 96(18,-3.4) 97(18.8,3.4) 98(18.8,-3.4) 99(19.6,3.4) 100(19.6,-3.4)
  round 0.5 hole 0.7 unplated mask+0.1: MH1(-26.7,4.2) MH2(-25.9,-4.2) MH3(26.7,4.2) MH4(25.9,-4.2)
  round 4.8 hole 5.1 unplated mask+0.1: MH5(-26.3,0) MH6(26.3,0)
  Top Layer keep-out region: -20.15,2.15 20.15,2.15 20.15,-2.15 -20.15,-2.15
  silkscreen extent -30.35,-4.4 30.35,5.02
BGA80P9X6-54 [mm] "BGA; 54 Balls; Body 8 x 14 mm; Pitch 0.8 mm (FG Package)"
  round 0.35 smd: A1(3.2,3.2) A2(3.2,2.4) A3(3.2,1.6) A7(3.2,-1.6) A8(3.2,-2.4) A9(3.2,-3.2) B1(2.4,3.2) B2(2.4,2.4) B3(2.4,1.6) B7(2.4,-1.6) B8(2.4,-2.4) B9(2.4,-3.2) C1(1.6,3.2) C2(1.6,2.4) C3(1.6,1.6) C7(1.6,-1.6) C8(1.6,-2.4) C9(1.6,-3.2) D1(0.8,3.2) D2(0.8,2.4) D3(0.8,1.6) D7(0.8,-1.6) D8(0.8,-2.4) D9(0.8,-3.2) E1(0,3.2) E2(0,2.4) E3(0,1.6) E7(0,-1.6) E8(0,-2.4) E9(0,-3.2) F1(-0.8,3.2) F2(-0.8,2.4) F3(-0.8,1.6) F7(-0.8,-1.6) F8(-0.8,-2.4) F9(-0.8,-3.2) G1(-1.6,3.2) G2(-1.6,2.4) G3(-1.6,1.6) G7(-1.6,-1.6) G8(-1.6,-2.4) G9(-1.6,-3.2) H1(-2.4,3.2) H2(-2.4,2.4) H3(-2.4,1.6) H7(-2.4,-1.6) H8(-2.4,-2.4) H9(-2.4,-3.2) J1(-3.2,3.2) J2(-3.2,2.4) J3(-3.2,1.6) J7(-3.2,-1.6) J8(-3.2,-2.4) J9(-3.2,-3.2)
  silkscreen extent -7,-4 7,4.78
BGA80P12X8-63 [mm] "BGA; 63 Balls; Body 12 x 11 mm; Pitch 0.8 mm"
  round 0.3 smd: A1(4.4,2.8) A2(4.4,2) A7(4.4,-2) A8(4.4,-2.8) B1(3.6,2.8) B7(3.6,-2) B8(3.6,-2.8) C2(2.8,2) C3(2.8,1.2) C4(2.8,0.4) C5(2.8,-0.4) C6(2.8,-1.2) C7(2.8,-2) D2(2,2) D3(2,1.2) D4(2,0.4) D5(2,-0.4) D6(2,-1.2) D7(2,-2) E2(1.2,2) E3(1.2,1.2) E4(1.2,0.4) E5(1.2,-0.4) E6(1.2,-1.2) E7(1.2,-2) F2(0.4,2) F3(0.4,1.2) F4(0.4,0.4) F5(0.4,-0.4) F6(0.4,-1.2) F7(0.4,-2) G2(-0.4,2) G3(-0.4,1.2) G4(-0.4,0.4) G5(-0.4,-0.4) G6(-0.4,-1.2) G7(-0.4,-2) H2(-1.2,2) H3(-1.2,1.2) H4(-1.2,0.4) H5(-1.2,-0.4) H6(-1.2,-1.2) H7(-1.2,-2) J2(-2,2) J3(-2,1.2) J4(-2,0.4) J5(-2,-0.4) J6(-2,-1.2) J7(-2,-2) K2(-2.8,2) K3(-2.8,1.2) K4(-2.8,0.4) K5(-2.8,-0.4) K6(-2.8,-1.2) K7(-2.8,-2) L1(-3.6,2.8) L2(-3.6,2) L7(-3.6,-2) L8(-3.6,-2.8) M1(-4.4,2.8) M2(-4.4,2) M7(-4.4,-2) M8(-4.4,-2.8)
  silkscreen extent -6,-5.5 6,6.28
BGA100P22X22-456 [mm] "456-Ball Fine-Pitch Ball Grid Array (FG456)"
  round 0.5 smd: A1(-10.5,10.5) A2(-9.5,10.5) A3(-8.5,10.5) A4(-7.5,10.5) A5(-6.5,10.5) A6(-5.5,10.5) A7(-4.5,10.5) A8(-3.5,10.5) A9(-2.5,10.5) A10(-1.5,10.5) A11(-0.5,10.5) A12(0.5,10.5) A13(1.5,10.5) A14(2.5,10.5) A15(3.5,10.5) A16(4.5,10.5) A17(5.5,10.5) A18(6.5,10.5) A19(7.5,10.5) A20(8.5,10.5) A21(9.5,10.5) A22(10.5,10.5) AA1(-10.5,-9.5) AA2(-9.5,-9.5) AA3(-8.5,-9.5) AA4(-7.5,-9.5) AA5(-6.5,-9.5) AA6(-5.5,-9.5) AA7(-4.5,-9.5) AA8(-3.5,-9.5) AA9(-2.5,-9.5) AA10(-1.5,-9.5) AA11(-0.5,-9.5) AA12(0.5,-9.5) AA13(1.5,-9.5) AA14(2.5,-9.5) AA15(3.5,-9.5) AA16(4.5,-9.5) AA17(5.5,-9.5) AA18(6.5,-9.5) AA19(7.5,-9.5) AA20(8.5,-9.5) AA21(9.5,-9.5) AA22(10.5,-9.5) AB1(-10.5,-10.5) AB2(-9.5,-10.5) AB3(-8.5,-10.5) AB4(-7.5,-10.5) AB5(-6.5,-10.5) AB6(-5.5,-10.5) AB7(-4.5,-10.5) AB8(-3.5,-10.5) AB9(-2.5,-10.5) AB10(-1.5,-10.5) AB11(-0.5,-10.5) AB12(0.5,-10.5) AB13(1.5,-10.5) AB14(2.5,-10.5) AB15(3.5,-10.5) AB16(4.5,-10.5) AB17(5.5,-10.5) AB18(6.5,-10.5) AB19(7.5,-10.5) AB20(8.5,-10.5) AB21(9.5,-10.5) AB22(10.5,-10.5) B1(-10.5,9.5) B2(-9.5,9.5) B3(-8.5,9.5) B4(-7.5,9.5) B5(-6.5,9.5) B6(-5.5,9.5) B7(-4.5,9.5) B8(-3.5,9.5) B9(-2.5,9.5) B10(-1.5,9.5) B11(-0.5,9.5) B12(0.5,9.5) B13(1.5,9.5) B14(2.5,9.5) B15(3.5,9.5) B16(4.5,9.5) B17(5.5,9.5) B18(6.5,9.5) B19(7.5,9.5) B20(8.5,9.5) B21(9.5,9.5) B22(10.5,9.5) C1(-10.5,8.5) C2(-9.5,8.5) C3(-8.5,8.5) C4(-7.5,8.5) C5(-6.5,8.5) C6(-5.5,8.5) C7(-4.5,8.5) C8(-3.5,8.5) C9(-2.5,8.5) C10(-1.5,8.5) C11(-0.5,8.5) C12(0.5,8.5) C13(1.5,8.5) C14(2.5,8.5) C15(3.5,8.5) C16(4.5,8.5) C17(5.5,8.5) C18(6.5,8.5) C19(7.5,8.5) C20(8.5,8.5) C21(9.5,8.5) C22(10.5,8.5) D1(-10.5,7.5) D2(-9.5,7.5) D3(-8.5,7.5) D4(-7.5,7.5) D5(-6.5,7.5) D6(-5.5,7.5) D7(-4.5,7.5) D8(-3.5,7.5) D9(-2.5,7.5) D10(-1.5,7.5) D11(-0.5,7.5) D12(0.5,7.5) D13(1.5,7.5) D14(2.5,7.5) D15(3.5,7.5) D16(4.5,7.5) D17(5.5,7.5) D18(6.5,7.5) D19(7.5,7.5) D20(8.5,7.5) D21(9.5,7.5) D22(10.5,7.5) E1(-10.5,6.5) E2(-9.5,6.5) E3(-8.5,6.5) E4(-7.5,6.5) E5(-6.5,6.5) E6(-5.5,6.5) E7(-4.5,6.5) E8(-3.5,6.5) E9(-2.5,6.5) E10(-1.5,6.5) E11(-0.5,6.5) E12(0.5,6.5) E13(1.5,6.5) E14(2.5,6.5) E15(3.5,6.5) E16(4.5,6.5) E17(5.5,6.5) E18(6.5,6.5) E19(7.5,6.5) E20(8.5,6.5) E21(9.5,6.5) E22(10.5,6.5) F1(-10.5,5.5) F2(-9.5,5.5) F3(-8.5,5.5) F4(-7.5,5.5) F5(-6.5,5.5) F6(-5.5,5.5) F7(-4.5,5.5) F8(-3.5,5.5) F9(-2.5,5.5) F10(-1.5,5.5) F11(-0.5,5.5) F12(0.5,5.5) F13(1.5,5.5) F14(2.5,5.5) F15(3.5,5.5) F16(4.5,5.5) F17(5.5,5.5) F18(6.5,5.5) F19(7.5,5.5) F20(8.5,5.5) F21(9.5,5.5) F22(10.5,5.5) G1(-10.5,4.5) G2(-9.5,4.5) G3(-8.5,4.5) G4(-7.5,4.5) G5(-6.5,4.5) G6(-5.5,4.5) G7(-4.5,4.5) G8(-3.5,4.5) G9(-2.5,4.5) G10(-1.5,4.5) G11(-0.5,4.5) G12(0.5,4.5) G13(1.5,4.5) G14(2.5,4.5) G15(3.5,4.5) G16(4.5,4.5) G17(5.5,4.5) G18(6.5,4.5) G19(7.5,4.5) G20(8.5,4.5) G21(9.5,4.5) G22(10.5,4.5) H1(-10.5,3.5) H2(-9.5,3.5) H3(-8.5,3.5) H4(-7.5,3.5) H5(-6.5,3.5) H6(-5.5,3.5) H7(-4.5,3.5) H16(4.5,3.5) H17(5.5,3.5) H18(6.5,3.5) H19(7.5,3.5) H20(8.5,3.5) H21(9.5,3.5) H22(10.5,3.5) J1(-10.5,2.5) J2(-9.5,2.5) J3(-8.5,2.5) J4(-7.5,2.5) J5(-6.5,2.5) J6(-5.5,2.5) J7(-4.5,2.5) J9(-2.5,2.5) J10(-1.5,2.5) J11(-0.5,2.5) J12(0.5,2.5) J13(1.5,2.5) J14(2.5,2.5) J16(4.5,2.5) J17(5.5,2.5) J18(6.5,2.5) J19(7.5,2.5) J20(8.5,2.5) J21(9.5,2.5) J22(10.5,2.5) K1(-10.5,1.5) K2(-9.5,1.5) K3(-8.5,1.5) K4(-7.5,1.5) K5(-6.5,1.5) K6(-5.5,1.5) K7(-4.5,1.5) K9(-2.5,1.5) K10(-1.5,1.5) K11(-0.5,1.5) K12(0.5,1.5) K13(1.5,1.5) K14(2.5,1.5) K16(4.5,1.5) K17(5.5,1.5) K18(6.5,1.5) K19(7.5,1.5) K20(8.5,1.5) K21(9.5,1.5) K22(10.5,1.5) L1(-10.5,0.5) L2(-9.5,0.5) L3(-8.5,0.5) L4(-7.5,0.5) L5(-6.5,0.5) L6(-5.5,0.5) L7(-4.5,0.5) L9(-2.5,0.5) L10(-1.5,0.5) L11(-0.5,0.5) L12(0.5,0.5) L13(1.5,0.5) L14(2.5,0.5) L16(4.5,0.5) L17(5.5,0.5) L18(6.5,0.5) L19(7.5,0.5) L20(8.5,0.5) L21(9.5,0.5) L22(10.5,0.5) M1(-10.5,-0.5) M2(-9.5,-0.5) M3(-8.5,-0.5) M4(-7.5,-0.5) M5(-6.5,-0.5) M6(-5.5,-0.5) M7(-4.5,-0.5) M9(-2.5,-0.5) M10(-1.5,-0.5) M11(-0.5,-0.5) M12(0.5,-0.5) M13(1.5,-0.5) M14(2.5,-0.5) M16(4.5,-0.5) M17(5.5,-0.5) M18(6.5,-0.5) M19(7.5,-0.5) M20(8.5,-0.5) M21(9.5,-0.5) M22(10.5,-0.5) N1(-10.5,-1.5) N2(-9.5,-1.5) N3(-8.5,-1.5) N4(-7.5,-1.5) N5(-6.5,-1.5) N6(-5.5,-1.5) N7(-4.5,-1.5) N9(-2.5,-1.5) N10(-1.5,-1.5) N11(-0.5,-1.5) N12(0.5,-1.5) N13(1.5,-1.5) N14(2.5,-1.5) N16(4.5,-1.5) N17(5.5,-1.5) N18(6.5,-1.5) N19(7.5,-1.5) N20(8.5,-1.5) N21(9.5,-1.5) N22(10.5,-1.5) P1(-10.5,-2.5) P2(-9.5,-2.5) P3(-8.5,-2.5) P4(-7.5,-2.5) P5(-6.5,-2.5) P6(-5.5,-2.5) P7(-4.5,-2.5) P9(-2.5,-2.5) P10(-1.5,-2.5) P11(-0.5,-2.5) P12(0.5,-2.5) P13(1.5,-2.5) P14(2.5,-2.5) P16(4.5,-2.5) P17(5.5,-2.5) P18(6.5,-2.5) P19(7.5,-2.5) P20(8.5,-2.5) P21(9.5,-2.5) P22(10.5,-2.5) R1(-10.5,-3.5) R2(-9.5,-3.5) R3(-8.5,-3.5) R4(-7.5,-3.5) R5(-6.5,-3.5) R6(-5.5,-3.5) R7(-4.5,-3.5) R16(4.5,-3.5) R17(5.5,-3.5) R18(6.5,-3.5) R19(7.5,-3.5) R20(8.5,-3.5) R21(9.5,-3.5) R22(10.5,-3.5) T1(-10.5,-4.5) T2(-9.5,-4.5) T3(-8.5,-4.5) T4(-7.5,-4.5) T5(-6.5,-4.5) T6(-5.5,-4.5) T7(-4.5,-4.5) T8(-3.5,-4.5) T9(-2.5,-4.5) T10(-1.5,-4.5) T11(-0.5,-4.5) T12(0.5,-4.5) T13(1.5,-4.5) T14(2.5,-4.5) T15(3.5,-4.5) T16(4.5,-4.5) T17(5.5,-4.5) T18(6.5,-4.5) T19(7.5,-4.5) T20(8.5,-4.5) T21(9.5,-4.5) T22(10.5,-4.5) U1(-10.5,-5.5) U2(-9.5,-5.5) U3(-8.5,-5.5) U4(-7.5,-5.5) U5(-6.5,-5.5) U6(-5.5,-5.5) U7(-4.5,-5.5) U8(-3.5,-5.5) U9(-2.5,-5.5) U10(-1.5,-5.5) U11(-0.5,-5.5) U12(0.5,-5.5) U13(1.5,-5.5) U14(2.5,-5.5) U15(3.5,-5.5) U16(4.5,-5.5) U17(5.5,-5.5) U18(6.5,-5.5) U19(7.5,-5.5) U20(8.5,-5.5) U21(9.5,-5.5) U22(10.5,-5.5) V1(-10.5,-6.5) V2(-9.5,-6.5) V3(-8.5,-6.5) V4(-7.5,-6.5) V5(-6.5,-6.5) V6(-5.5,-6.5) V7(-4.5,-6.5) V8(-3.5,-6.5) V9(-2.5,-6.5) V10(-1.5,-6.5) V11(-0.5,-6.5) V12(0.5,-6.5) V13(1.5,-6.5) V14(2.5,-6.5) V15(3.5,-6.5) V16(4.5,-6.5) V17(5.5,-6.5) V18(6.5,-6.5) V19(7.5,-6.5) V20(8.5,-6.5) V21(9.5,-6.5) V22(10.5,-6.5) W1(-10.5,-7.5) W2(-9.5,-7.5) W3(-8.5,-7.5) W4(-7.5,-7.5) W5(-6.5,-7.5) W6(-5.5,-7.5) W7(-4.5,-7.5) W8(-3.5,-7.5) W9(-2.5,-7.5) W10(-1.5,-7.5) W11(-0.5,-7.5) W12(0.5,-7.5) W13(1.5,-7.5) W14(2.5,-7.5) W15(3.5,-7.5) W16(4.5,-7.5) W17(5.5,-7.5) W18(6.5,-7.5) W19(7.5,-7.5) W20(8.5,-7.5) W21(9.5,-7.5) W22(10.5,-7.5) Y1(-10.5,-8.5) Y2(-9.5,-8.5) Y3(-8.5,-8.5) Y4(-7.5,-8.5) Y5(-6.5,-8.5) Y6(-5.5,-8.5) Y7(-4.5,-8.5) Y8(-3.5,-8.5) Y9(-2.5,-8.5) Y10(-1.5,-8.5) Y11(-0.5,-8.5) Y12(0.5,-8.5) Y13(1.5,-8.5) Y14(2.5,-8.5) Y15(3.5,-8.5) Y16(4.5,-8.5) Y17(5.5,-8.5) Y18(6.5,-8.5) Y19(7.5,-8.5) Y20(8.5,-8.5) Y21(9.5,-8.5) Y22(10.5,-8.5)
  silkscreen extent -12.27,-11.5 11.5,11.5
CAPC1005 [mm]
  rect 0.6x0.5 smd: 1(-0.5,0) 2(0.5,0)
  silkscreen extent -0.1,-0.2 0.1,0.2
CAPC1608 [mm]
  rect 1.1x1 smd: 1(-0.85,0) 2(0.85,0)
  silkscreen extent -1.7,-0.4 -1.7,0.4
CAPC3528 [mm]
  rect 2x2.2 smd: 1(-1.5,0) 2(1.5,0)
  silkscreen extent -2.3,-1.6 1.8,1.6
CAPC7343 [mm]
  rect 2.6x2.4 smd: 1(-3.202,0.007) 2(3.198,0.007)
  silkscreen extent -4.2,-2.39 3.7,2.41
HDR1X2 [mm] "Connector; Header; 2 Position"
  rect 1.5x1.5 hole 0.889: 1(0,0)
  round 1.5 hole 0.889: 2(2.54,0)
  silkscreen extent -1.27,-1.27 3.81,1.27
HDR1X3 [mm] "Connector; Header; 3 Position"
  rect 1.5x1.5 hole 0.9: 1(0,0)
  round 1.5 hole 0.9: 2(2.54,0) 3(5.08,0)
  silkscreen extent -1.27,-1.27 6.35,1.27
HDR1X6 [mm] "Connector; Header; 6 Position"
  rect 1.5x1.5 hole 0.9: 1(0,0)
  round 1.5 hole 0.9: 2(2.54,0) 3(5.08,0) 4(7.62,0) 5(10.16,0) 6(12.7,0)
  silkscreen extent -1.27,-1.27 13.97,1.27
IDC2.54-V20D [mm]
  rect 1.65x1.65 hole 0.889: 1(-11.43,-1.27)
  round 1.65 hole 0.889: 2(-11.43,1.27) 3(-8.89,-1.27) 4(-8.89,1.27) 5(-6.35,-1.27) 6(-6.35,1.27) 7(-3.81,-1.27) 8(-3.81,1.27) 9(-1.27,-1.27) 10(-1.27,1.27) 11(1.27,-1.27) 12(1.27,1.27) 13(3.81,-1.27) 14(3.81,1.27) 15(6.35,-1.27) 16(6.35,1.27) 17(8.89,-1.27) 18(8.89,1.27) 19(11.43,-1.27) 20(11.43,1.27)
  silkscreen extent -16.51,-5.37 16.51,4.6
LED2013 [mm]
  rect 1.3x1.6 smd: 1(0.95,0) 2(-0.95,0)
  silkscreen extent -2.13,-1.15 2,1.15
QFP40P2000X2000-176 [mm] "QFP; 176 Leads; Body 20 x 20 mm; Pitch 0.4 mm"
  rect 1.6x0.25 smd: 1(-10.6,8.6) 2(-10.6,8.2) 3(-10.6,7.8) 4(-10.6,7.4) 5(-10.6,7) 6(-10.6,6.6) 7(-10.6,6.2) 8(-10.6,5.8) 9(-10.6,5.4) 10(-10.6,5) 11(-10.6,4.6) 12(-10.6,4.2) 13(-10.6,3.8) 14(-10.6,3.4) 15(-10.6,3) 16(-10.6,2.6) 17(-10.6,2.2) 18(-10.6,1.8) 19(-10.6,1.4) 20(-10.6,1) 21(-10.6,0.6) 22(-10.6,0.2) 23(-10.6,-0.2) 24(-10.6,-0.6) 25(-10.6,-1) 26(-10.6,-1.4) 27(-10.6,-1.8) 28(-10.6,-2.2) 29(-10.6,-2.6) 30(-10.6,-3) 31(-10.6,-3.4) 32(-10.6,-3.8) 33(-10.6,-4.2) 34(-10.6,-4.6) 35(-10.6,-5) 36(-10.6,-5.4) 37(-10.6,-5.8) 38(-10.6,-6.2) 39(-10.6,-6.6) 40(-10.6,-7) 41(-10.6,-7.4) 42(-10.6,-7.8) 43(-10.6,-8.2) 44(-10.6,-8.6) 89(10.6,-8.6) 90(10.6,-8.2) 91(10.6,-7.8) 92(10.6,-7.4) 93(10.6,-7) 94(10.6,-6.6) 95(10.6,-6.2) 96(10.6,-5.8) 97(10.6,-5.4) 98(10.6,-5) 99(10.6,-4.6) 100(10.6,-4.2) 101(10.6,-3.8) 102(10.6,-3.4) 103(10.6,-3) 104(10.6,-2.6) 105(10.6,-2.2) 106(10.6,-1.8) 107(10.6,-1.4) 108(10.6,-1) 109(10.6,-0.6) 110(10.6,-0.2) 111(10.6,0.2) 112(10.6,0.6) 113(10.6,1) 114(10.6,1.4) 115(10.6,1.8) 116(10.6,2.2) 117(10.6,2.6) 118(10.6,3) 119(10.6,3.4) 120(10.6,3.8) 121(10.6,4.2) 122(10.6,4.6) 123(10.6,5) 124(10.6,5.4) 125(10.6,5.8) 126(10.6,6.2) 127(10.6,6.6) 128(10.6,7) 129(10.6,7.4) 130(10.6,7.8) 131(10.6,8.2) 132(10.6,8.6)
  rect 0.25x1.6 smd: 45(-8.6,-10.6) 46(-8.2,-10.6) 47(-7.8,-10.6) 48(-7.4,-10.6) 49(-7,-10.6) 50(-6.6,-10.6) 51(-6.2,-10.6) 52(-5.8,-10.6) 53(-5.4,-10.6) 54(-5,-10.6) 55(-4.6,-10.6) 56(-4.2,-10.6) 57(-3.8,-10.6) 58(-3.4,-10.6) 59(-3,-10.6) 60(-2.6,-10.6) 61(-2.2,-10.6) 62(-1.8,-10.6) 63(-1.4,-10.6) 64(-1,-10.6) 65(-0.6,-10.6) 66(-0.2,-10.6) 67(0.2,-10.6) 68(0.6,-10.6) 69(1,-10.6) 70(1.4,-10.6) 71(1.8,-10.6) 72(2.2,-10.6) 73(2.6,-10.6) 74(3,-10.6) 75(3.4,-10.6) 76(3.8,-10.6) 77(4.2,-10.6) 78(4.6,-10.6) 79(5,-10.6) 80(5.4,-10.6) 81(5.8,-10.6) 82(6.2,-10.6) 83(6.6,-10.6) 84(7,-10.6) 85(7.4,-10.6) 86(7.8,-10.6) 87(8.2,-10.6) 88(8.6,-10.6) 133(8.6,10.6) 134(8.2,10.6) 135(7.8,10.6) 136(7.4,10.6) 137(7,10.6) 138(6.6,10.6) 139(6.2,10.6) 140(5.8,10.6) 141(5.4,10.6) 142(5,10.6) 143(4.6,10.6) 144(4.2,10.6) 145(3.8,10.6) 146(3.4,10.6) 147(3,10.6) 148(2.6,10.6) 149(2.2,10.6) 150(1.8,10.6) 151(1.4,10.6) 152(1,10.6) 153(0.6,10.6) 154(0.2,10.6) 155(-0.2,10.6) 156(-0.6,10.6) 157(-1,10.6) 158(-1.4,10.6) 159(-1.8,10.6) 160(-2.2,10.6) 161(-2.6,10.6) 162(-3,10.6) 163(-3.4,10.6) 164(-3.8,10.6) 165(-4.2,10.6) 166(-4.6,10.6) 167(-5,10.6) 168(-5.4,10.6) 169(-5.8,10.6) 170(-6.2,10.6) 171(-6.6,10.6) 172(-7,10.6) 173(-7.4,10.6) 174(-7.8,10.6) 175(-8.2,10.6) 176(-8.6,10.6)
  silkscreen extent -12.07,-9.4 9.4,9.4
RESC1005 [mm]
  rect 0.6x0.5 smd: 1(0.5,0) 2(-0.5,0)
  silkscreen extent -0.1,-0.2 0.1,0.2
RESC2012 [mm]
  rect 1.3x1.5 smd: 1(-0.95,0) 2(0.95,0)
SOP127P600-8 [mm]
  rect 0.6x2.2 smd: 1(-1.905,-2.6) 2(-0.635,-2.6) 3(0.635,-2.6) 4(1.905,-2.6) 5(1.905,2.6) 6(0.635,2.6) 7(-0.635,2.6) 8(-1.905,2.6)
  silkscreen extent -2.88,-2.72 2.5,1.1
SOT95P230-3 [mm]
  rect 0.9x0.95 smd: 1(-0.95,-1.25) 2(0.95,-1.25) 3(0,1.25)
  silkscreen extent -2.07,-1.37 1.3,1.25
SOT95P280-5 [mm] "SOT-23/SC-74A; 5 Leads; Body 3.1 x 3 mm, inc. leads (LxW max)"
  rect 0.55x1.45 smd: 1(-0.95,-1.075) 2(0,-1.075) 3(0.95,-1.075) 4(0.95,1.075) 5(-0.95,1.075)
  silkscreen extent -1.57,-1.35 1.55,0.9
TestPin [mil] "SingleTest Pin"
  round 60 hole 35: 1(0,0)
TO254P1435-4 [mm]
  rect 1x3.4 smd: 1(0,0) 2(2.54,0) 3(5.08,0)
  rect 10.25x8.9 smd: 4(2.54,10.45)
  silkscreen extent -3.1,-0.13 8.2,14.8
TSOP65P638-16 [mm]
  rect 0.3x1.65 smd: 1(-2.275,-2.775) 2(-1.625,-2.775) 3(-0.975,-2.775) 4(-0.325,-2.775) 5(0.325,-2.775) 6(0.975,-2.775) 7(1.625,-2.775) 8(2.275,-2.775) 9(2.275,2.775) 10(1.625,2.775) 11(0.975,2.775) 12(0.325,2.775) 13(-0.325,2.775) 14(-0.975,2.775) 15(-1.625,2.775) 16(-2.275,2.775)
  silkscreen extent -3.1,-2.9 2.55,1.55
TSOP80P1176-44 [mm]
  rect 0.45x1.4 smd: 1(-8.4,-5.7) 2(-7.6,-5.7) 3(-6.8,-5.7) 4(-6,-5.7) 5(-5.2,-5.7) 6(-4.4,-5.7) 7(-3.6,-5.7) 8(-2.8,-5.7) 9(-2,-5.7) 10(-1.2,-5.7) 11(-0.4,-5.7) 12(0.4,-5.7) 13(1.2,-5.7) 14(2,-5.7) 15(2.8,-5.7) 16(3.6,-5.7) 17(4.4,-5.7) 18(5.2,-5.7) 19(6,-5.7) 20(6.8,-5.7) 21(7.6,-5.7) 22(8.4,-5.7) 23(8.4,5.7) 24(7.6,5.7) 25(6.8,5.7) 26(6,5.7) 27(5.2,5.7) 28(4.4,5.7) 29(3.6,5.7) 30(2.8,5.7) 31(2,5.7) 32(1.2,5.7) 33(0.4,5.7) 34(-0.4,5.7) 35(-1.2,5.7) 36(-2,5.7) 37(-2.8,5.7) 38(-3.6,5.7) 39(-4.4,5.7) 40(-5.2,5.7) 41(-6,5.7) 42(-6.8,5.7) 43(-7.6,5.7) 44(-8.4,5.7)
  silkscreen extent -9.29,-5.7 9.26,4.45